# Altium PCB quark_dog_driver.PcbDoc (part 1 of 3)
Units mil, origin at the board's own origin, x right, y up, seen from the top; angles counter-clockwise.
Board outline 3937.01 x 2362.2 mil, 4 copper layers (Top Layer 1, signal1, signal2, Bottom Layer 1), stack 23.756 mil thick; 353 components, 275 nets, 1099 pads, 468 vias.
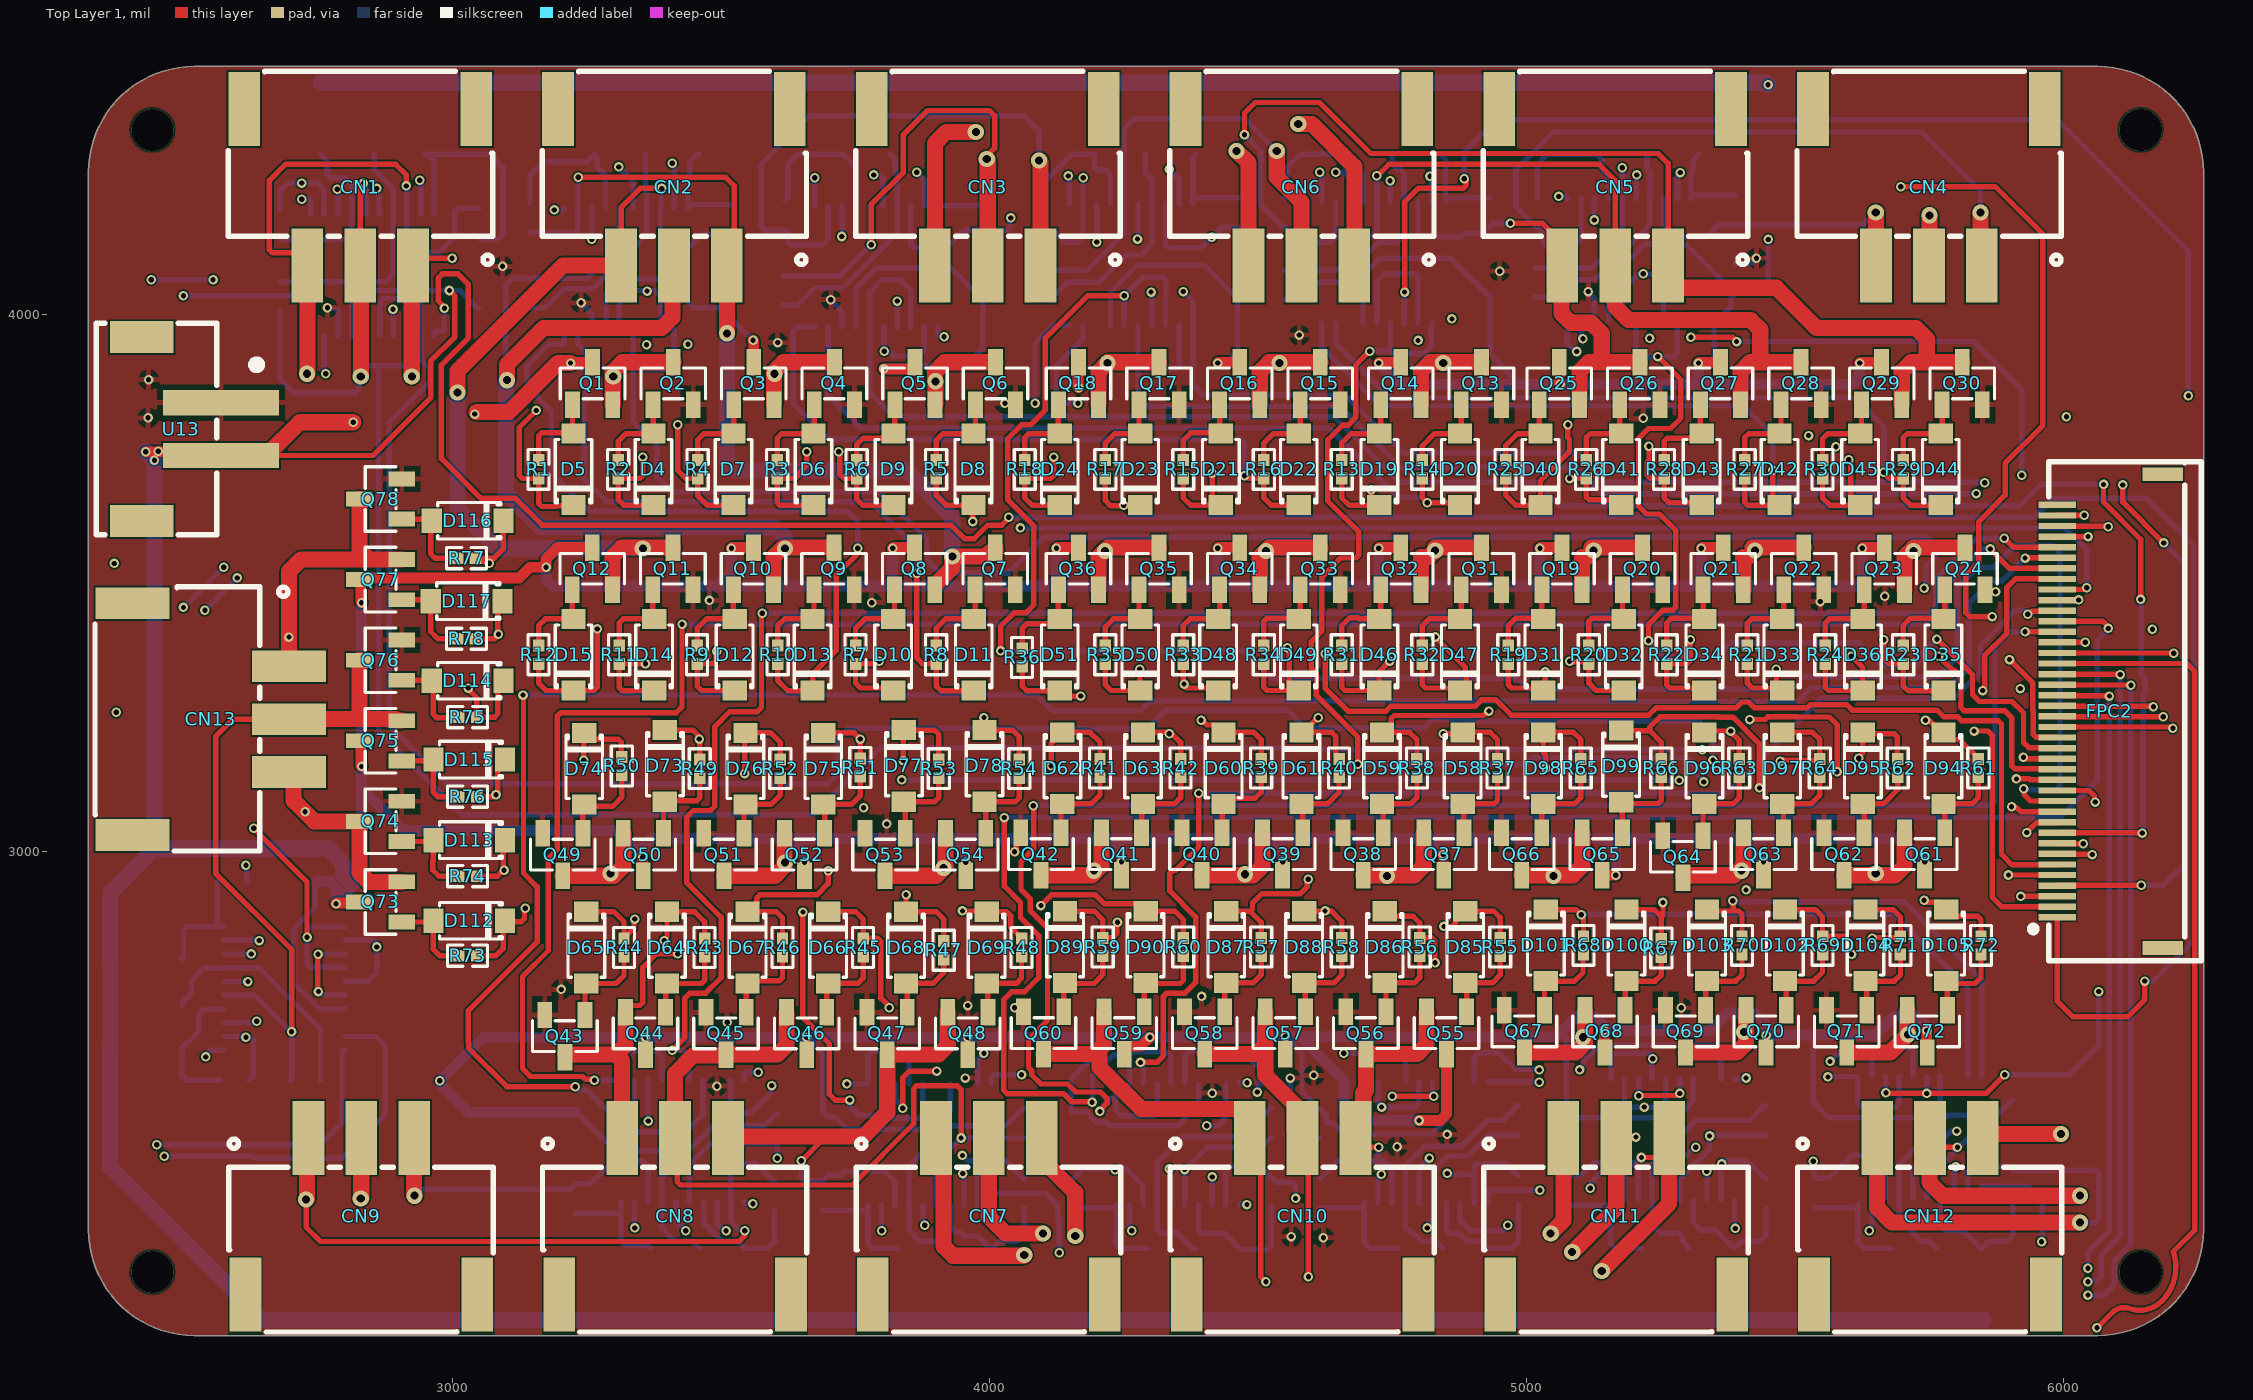
[diagram p0: Top Layer 1 view]
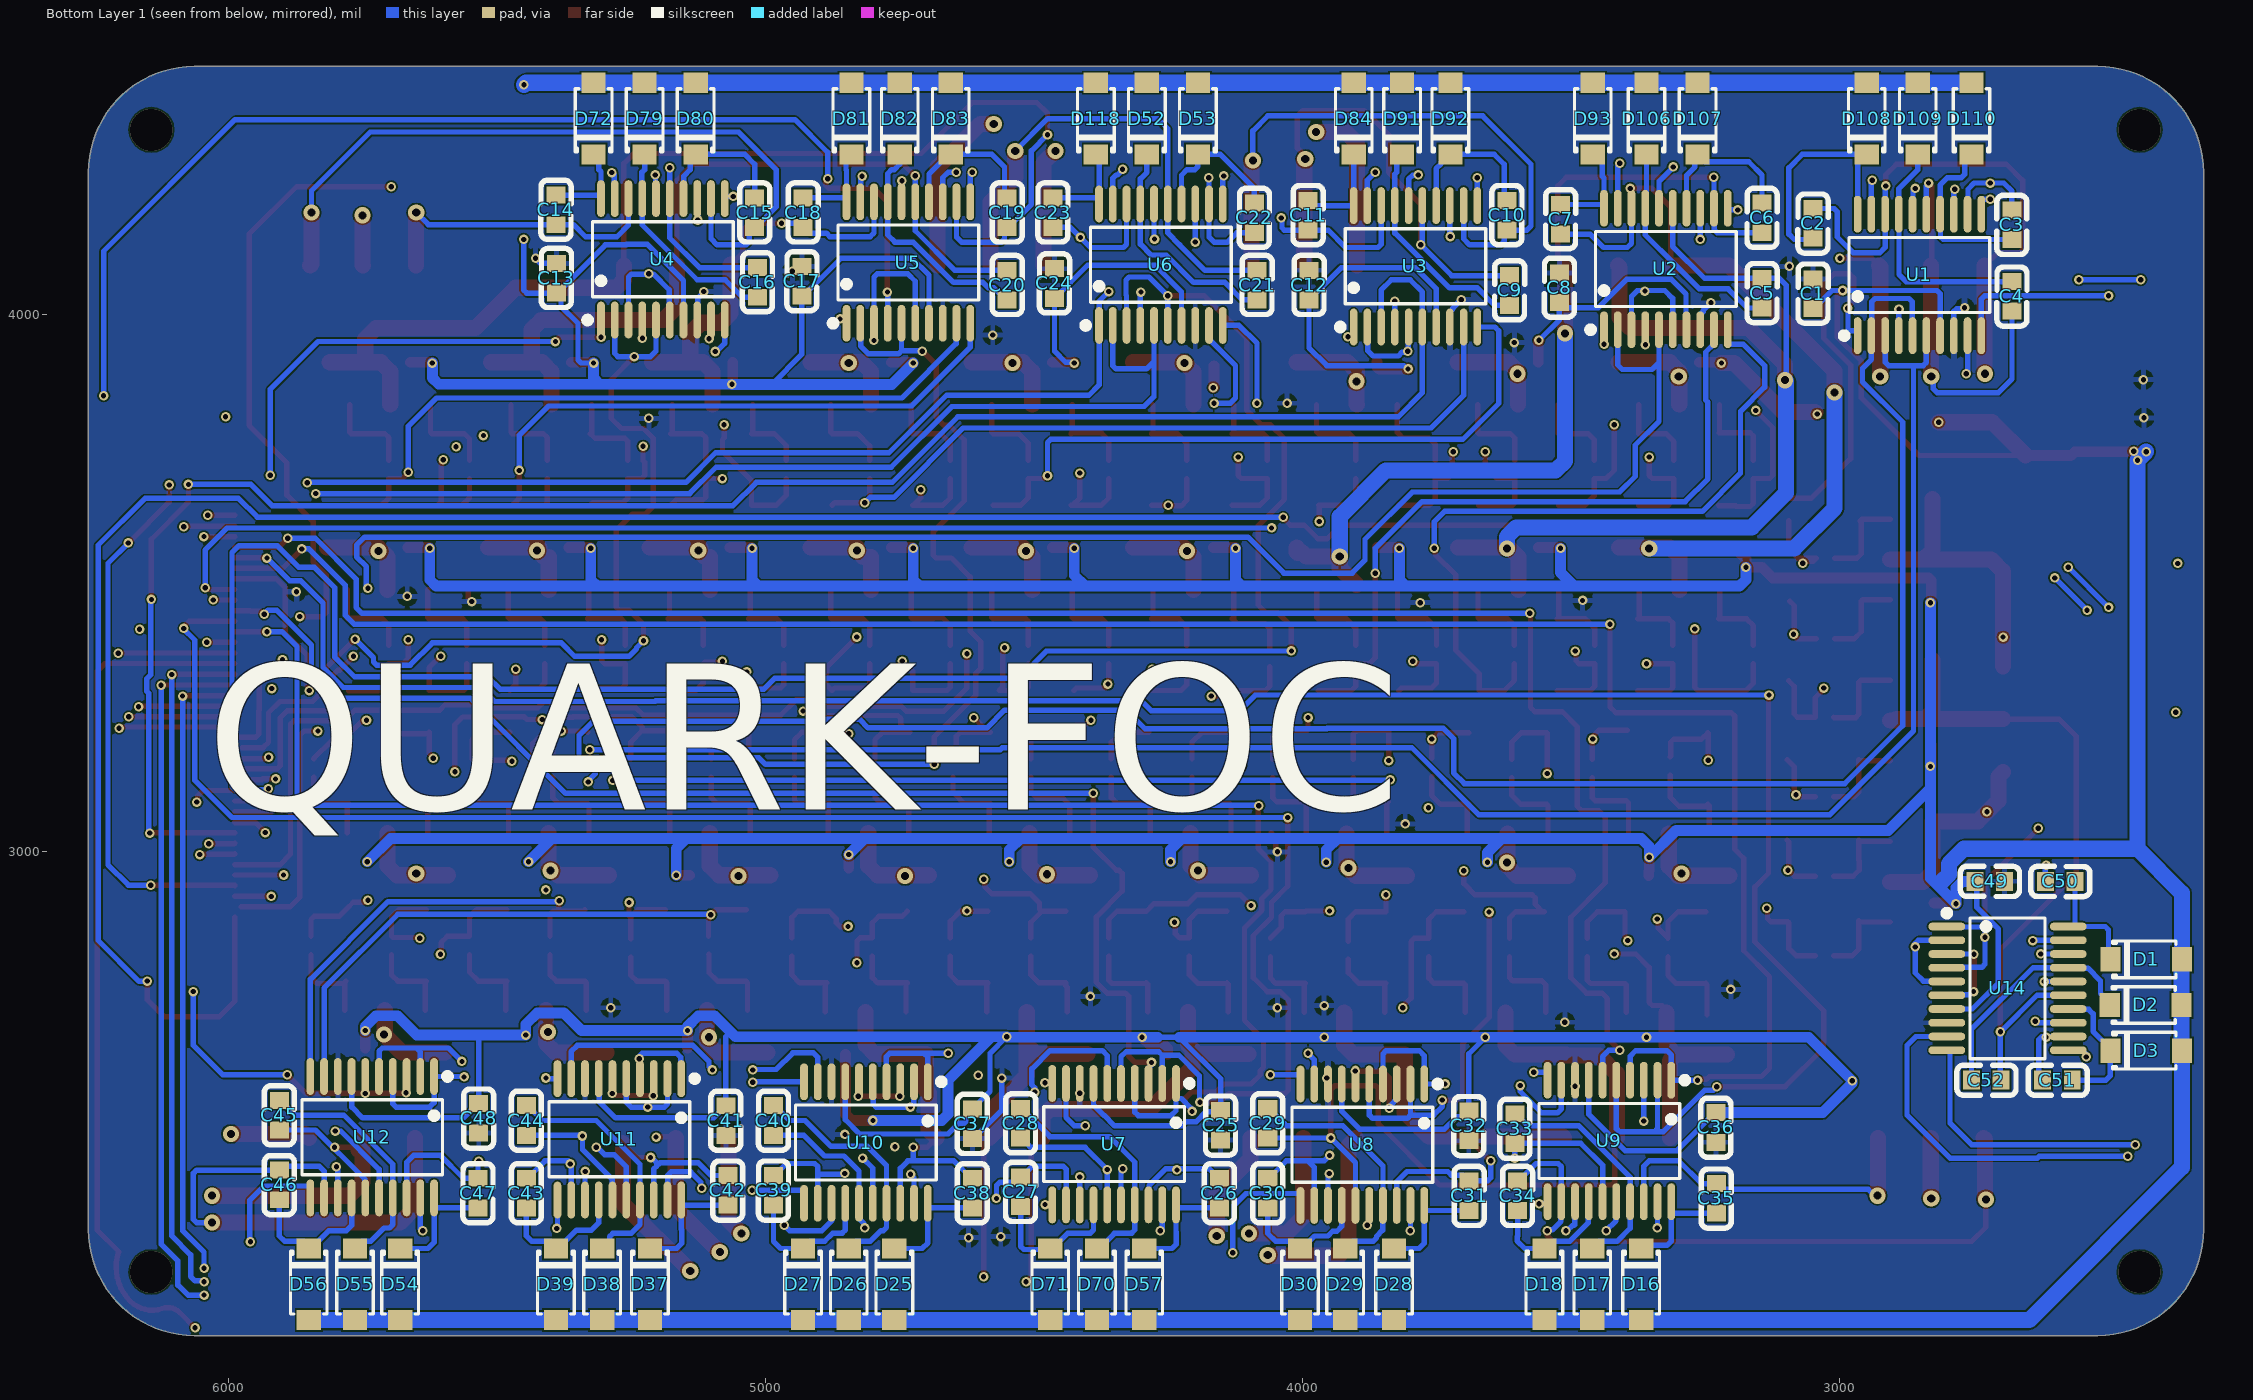
[diagram p1: Bottom Layer 1 view, seen from below]
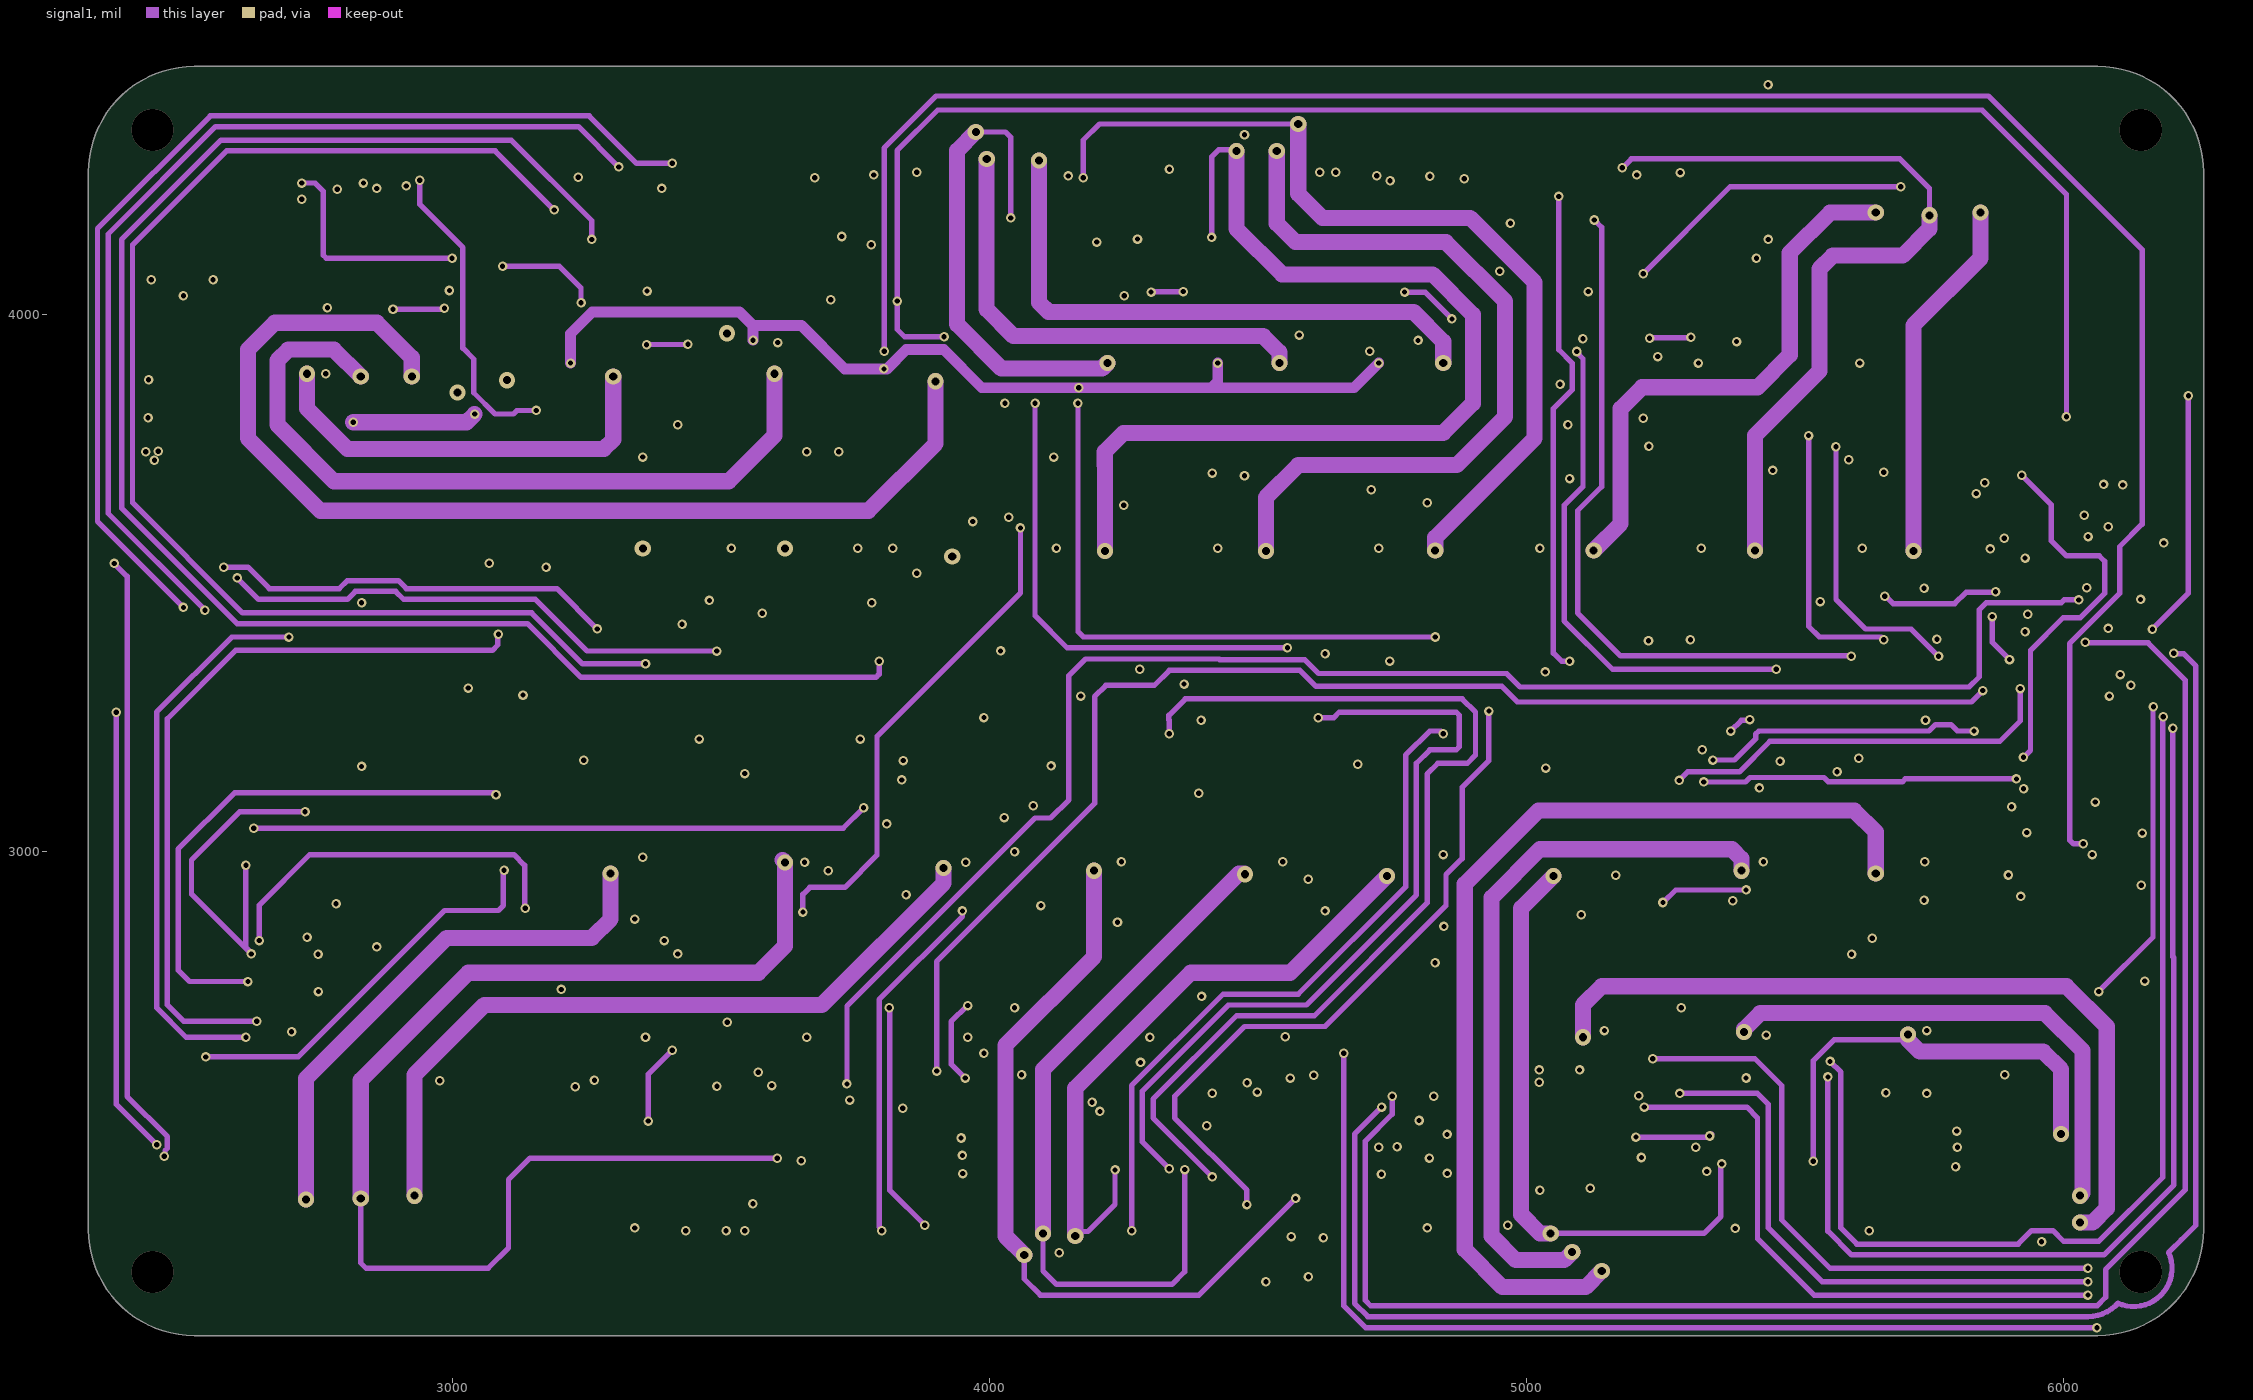
[diagram p2: signal1]
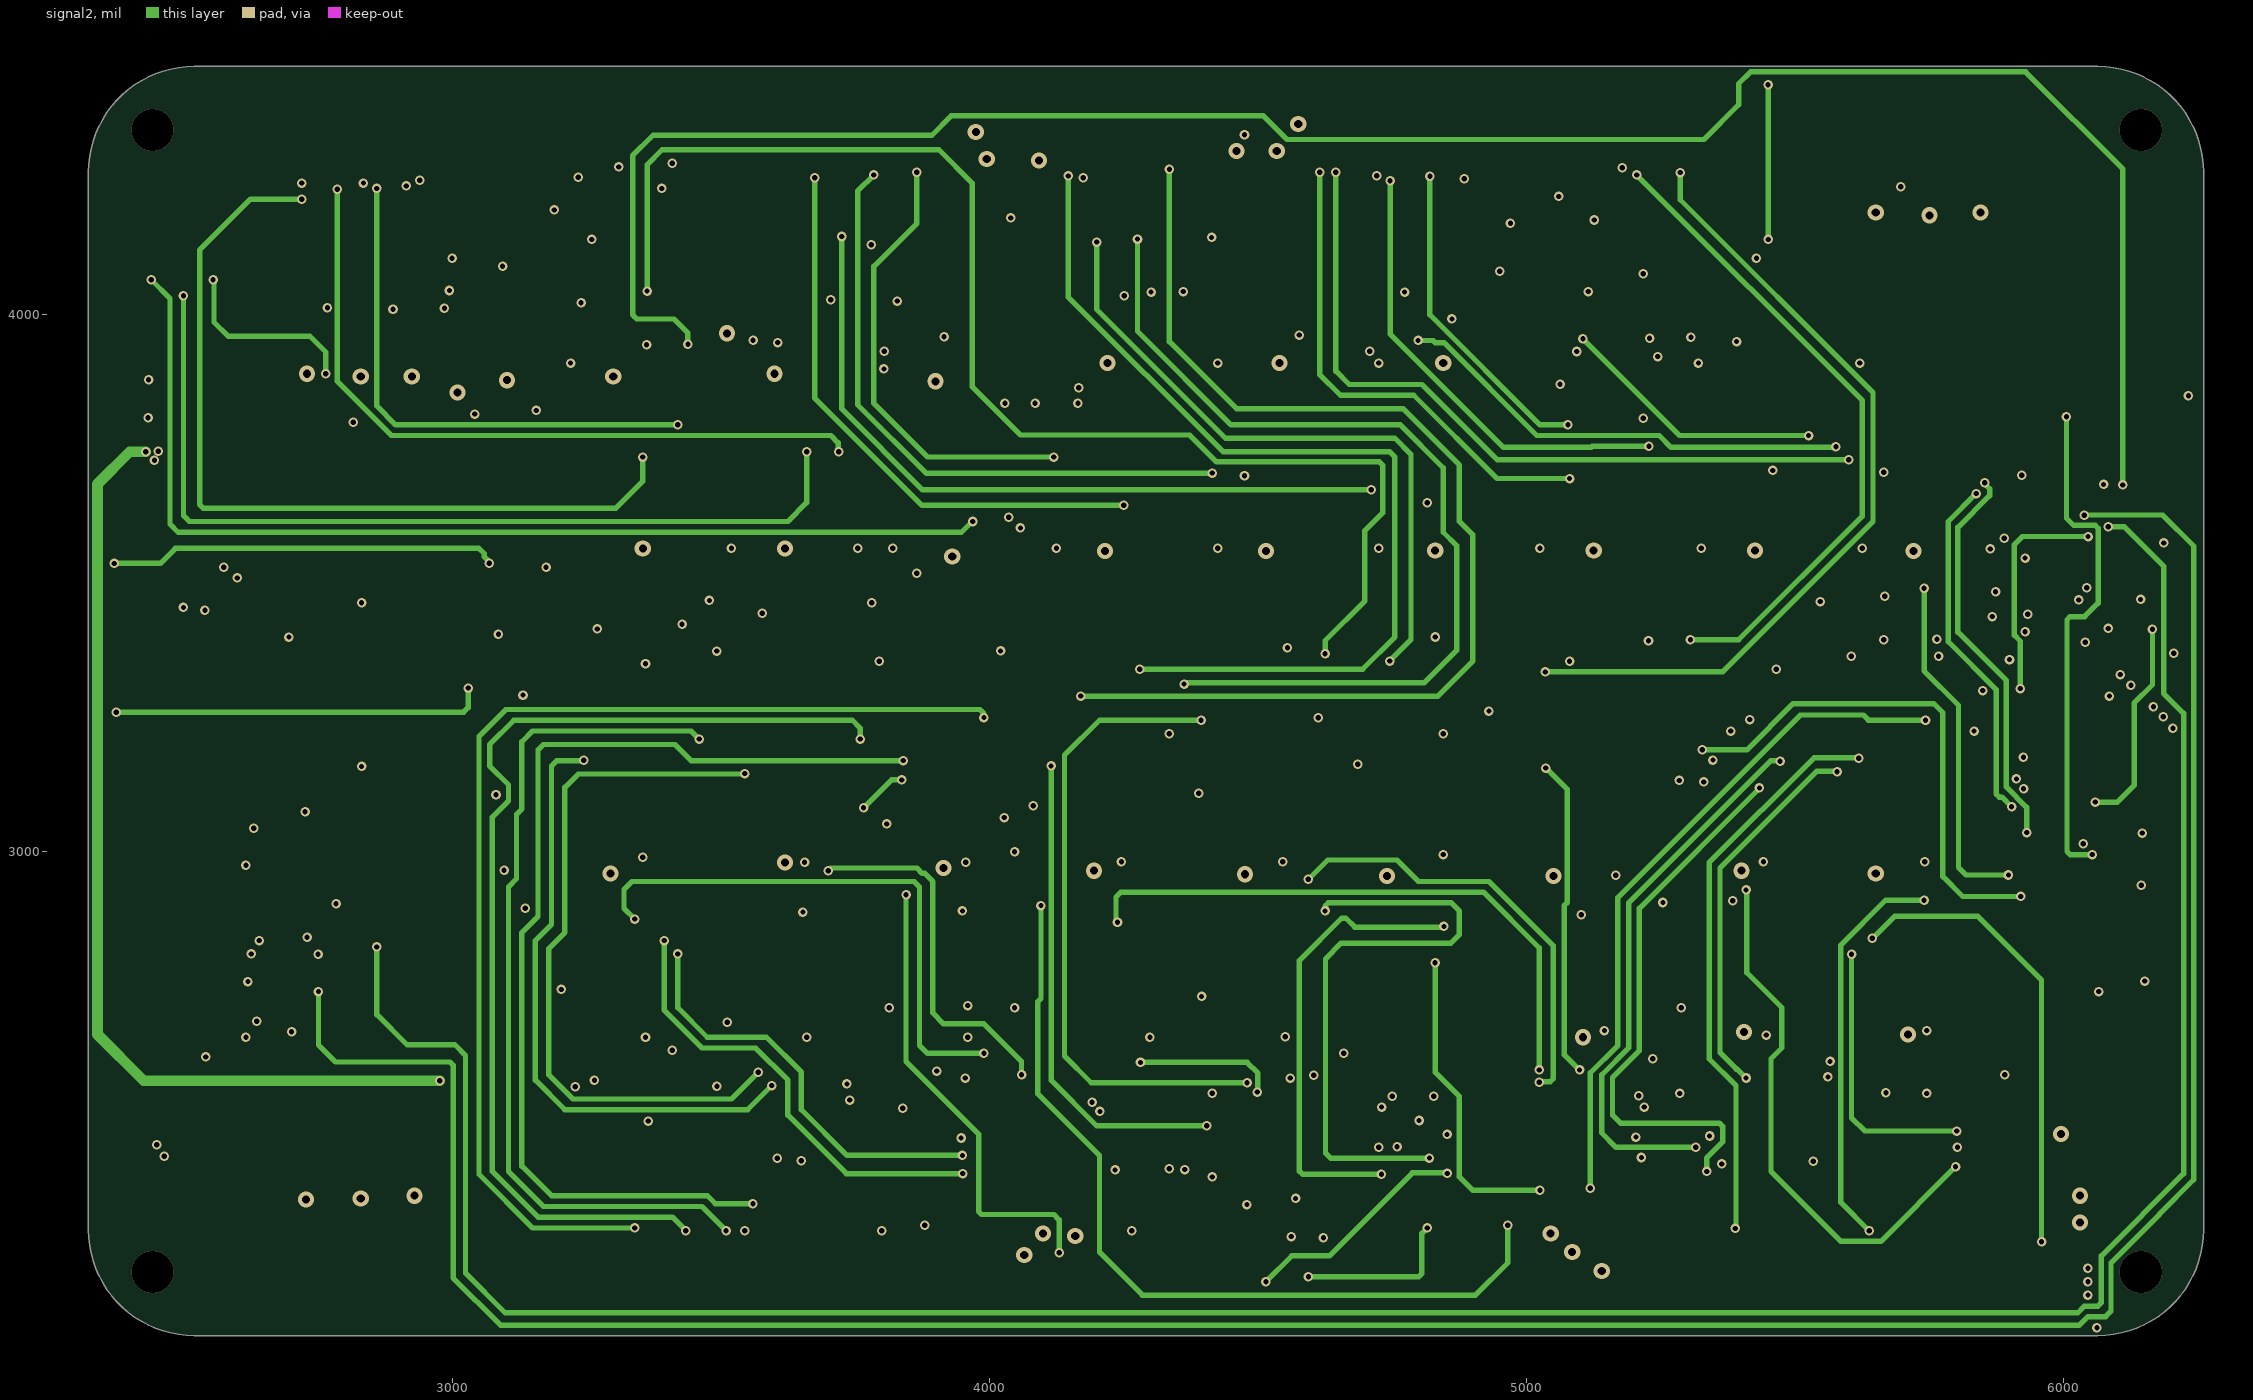
[diagram p3: signal2]

## Layer stack, top to bottom
Top Solder: solder mask 0.4, Solder Resist, Dk 3.5
Top Layer 1: signal copper 1.378
Dielectric 2: prepreg 2.8, PP-006, Dk 4.1
signal1: signal copper 1.4
Dielectric 1: dielectric 12.6, FR-4, Dk 4.8
signal2: signal copper 1.4
Dielectric 3: prepreg 2.8, PP-006, Dk 4.1
Bottom Layer 1: signal copper 1.378
Bottom Solder: solder mask 0.4, Solder Resist, Dk 3.5

## Board outline
2323.15,2296.65 ccw(c2520,2296.65) 2520,2099.8 6063.31,2099.8 ccw(c6063.31,2296.65) 6260.16,2296.65 6260.16,4265.15 ccw(c6063.31,4265.15) 6063.31,4462 2520,4462 ccw(c2520,4265.15) 2323.15,4265.15

## Design rules (kind name [scope] priority, off if disabled: settings)
Clearance [All] p1: gap=3 ignorepadtopadclearanceinfootprint=FALSE
ComponentClearance [All] p1: gap=0 collisioncheckmode=3 verticalgap=10 showdistances=FALSE
PolygonConnect [All] p1: connectstyle=Relief reliefconductorwidth=10 reliefentries=4 polygonreliefangle="90 Angle" airgapwidth=10
RoutingVias [All] p1: holewidth=28 width=50 viastyle="Through Hole" minholewidth=28 minwidth=50 maxholewidth=28 maxwidth=50
SolderMaskExpansion [All] p1: expansion=4 istentingtop=FALSE
Width [All] p1: maxlimit=50 minlimit=10 preferedwidth=10 minimp=50.000000 maximp=50.000000 favimp=50.000000
29 further rules are at their usual default settings.

## Components (designator, comment, footprint, x,y, rotation, side; value= is the part's Value field where it differs from the comment)
C1 "0.1u" C0603 3050.11,4039.03 r270 bottom
C2 "0.1u" C0603 3050,4170 r90 bottom
C3 "0.1u" C0603 2680,4167.44 r90 bottom
C4 "0.1u" C0603 2679.68,4034.03 r90 bottom
C5 "0.1u" C0603 3145,4040 r270 bottom
C6 "0.1u" C0603 3145,4180 r270 bottom
C7 "0.1u" C0603 3520,4177.44 r270 bottom
C8 "0.1u" C0603 3522.22,4050.03 r270 bottom
C9 "0.1u" C0603 3615,4045 r270 bottom
C10 "0.1u" C0603 3620,4185 r270 bottom
C11 "0.1u" C0603 3990,4185 r270 bottom
C12 "0.1u" C0603 3988.22,4055.03 r270 bottom
C13 "0.1u" C0603 5389.22,4068.03 r270 bottom
C14 "0.1u" C0603 5390,4195 r270 bottom
C15 "0.1u" C0603 5020,4190 r270 bottom
C16 "0.1u" C0603 5015,4060 r270 bottom
C17 "0.1u" C0603 4932.22,4062.03 r270 bottom
C18 "0.1u" C0603 4930,4190 r270 bottom
C19 "0.1u" C0603 4550,4190 r270 bottom
C20 "0.1u" C0603 4550,4055 r270 bottom
C21 "0.1u" C0603 4085,4055 r270 bottom
C22 "0.1u" C0603 4090,4180 r270 bottom
C23 "0.1u" C0603 4465,4190 r270 bottom
C24 "0.1u" C0603 4462.07,4058.03 r270 bottom
C25 "0.1u" C0603 4152.78,2490.97 r90 bottom
C26 "0.1u" C0603 4155,2365 r90 bottom
C27 "0.1u" C0603 4525,2367.45 r90 bottom
C28 "0.1u" C0603 4525,2495 r90 bottom
C29 "0.1u" C0603 4065,2495 r90 bottom
C30 "0.1u" C0603 4065,2365 r90 bottom
C31 "0.1u" C0603 3690,2360 r90 bottom
C32 "0.1u" C0603 3690.78,2489.97 r90 bottom
C33 "0.1u" C0603 3605,2485 r90 bottom
C34 "0.1u" C0603 3600,2360 r90 bottom
C35 "0.1u" C0603 3230,2355 r90 bottom
C36 "0.1u" C0603 3230.79,2487 r90 bottom
C37 "0.1u" C0603 4614.78,2493.97 r90 bottom
C38 "0.1u" C0603 4615,2365 r90 bottom
C39 "0.1u" C0603 4985,2370 r90 bottom
C40 "0.1u" C0603 4985,2500 r90 bottom
C41 "0.1u" C0603 5073.78,2499.97 r90 bottom
C42 "0.1u" C0603 5070,2370 r90 bottom
C43 "0.1u" C0603 5445,2365 r90 bottom
C44 "0.1u" C0603 5445,2500 r90 bottom
C45 "0.1u" C0603 5905,2510 r90 bottom
C46 "0.1u" C0603 5905,2380 r90 bottom
C47 "0.1u" C0603 5535,2365 r90 bottom
C48 "0.1u" C0603 5533.78,2503.97 r90 bottom
C49 "0.1u" C0603 2721,2945.24 r0 bottom
C50 "0.1u" C0603 2590,2945 r0 bottom
C51 "0.1u" C0603 2595,2575 r0 bottom
C52 "0.1u" C0603 2727.45,2575 r0 bottom
CN1 "WAFER-XH2.54-3PWB" CONN-SMD_3P-P2.50_XUNPU_WAFER-XH2.54-3PWB 2829,4237.03 r180 top locked
CN2 "WAFER-XH2.54-3PWB" CONN-SMD_3P-P2.50_XUNPU_WAFER-XH2.54-3PWB 3413,4237.03 r180 top locked
CN3 "WAFER-XH2.54-3PWB" CONN-SMD_3P-P2.50_XUNPU_WAFER-XH2.54-3PWB 3997,4237.03 r180 top locked
CN4 "WAFER-XH2.54-3PWB" CONN-SMD_3P-P2.50_XUNPU_WAFER-XH2.54-3PWB 5749,4237.03 r180 top locked
CN5 "WAFER-XH2.54-3PWB" CONN-SMD_3P-P2.50_XUNPU_WAFER-XH2.54-3PWB 5165,4237.03 r180 top locked
CN6 "WAFER-XH2.54-3PWB" CONN-SMD_3P-P2.50_XUNPU_WAFER-XH2.54-3PWB 4581,4237.03 r180 top locked
CN7 "WAFER-XH2.54-3PWB" CONN-SMD_3P-P2.50_XUNPU_WAFER-XH2.54-3PWB 3999,2322.03 r0 top locked
CN8 "WAFER-XH2.54-3PWB" CONN-SMD_3P-P2.50_XUNPU_WAFER-XH2.54-3PWB 3415,2322.03 r0 top locked
CN9 "WAFER-XH2.54-3PWB" CONN-SMD_3P-P2.50_XUNPU_WAFER-XH2.54-3PWB 2831,2322.03 r0 top locked
CN10 "WAFER-XH2.54-3PWB" CONN-SMD_3P-P2.50_XUNPU_WAFER-XH2.54-3PWB 4583.01,2322.03 r0 top locked
CN11 "WAFER-XH2.54-3PWB" CONN-SMD_3P-P2.50_XUNPU_WAFER-XH2.54-3PWB 5167.01,2322.03 r0 top locked
CN12 "WAFER-XH2.54-3PWB" CONN-SMD_3P-P2.50_XUNPU_WAFER-XH2.54-3PWB 5751,2322.03 r0 top locked
CN13 "WAFER-XH2.54-3PWB" CONN-SMD_3P-P2.50_XUNPU_WAFER-XH2.54-3PWB 2551,3247.03 r270 top locked
D1 "FR107_C511885" SOD-123_L2.8-W1.8-LS3.7-RD 2430,2800 r180 bottom
D2 "FR107_C511885" SOD-123_L2.8-W1.8-LS3.7-RD 2431,2715.03 r180 bottom
D3 "FR107_C511885" SOD-123_L2.8-W1.8-LS3.7-RD 2430,2630 r180 bottom
D4 "1N4148W_C176288" SOD-123_L2.8-W1.8-LS3.7-RD 3374.9,3712.03 r90 top
D5 "1N4148W_C176288" SOD-123_L2.8-W1.8-LS3.7-RD 3226,3712.03 r90 top
D6 "1N4148W_C176288" SOD-123_L2.8-W1.8-LS3.7-RD 3672.68,3712.03 r90 top
D7 "1N4148W_C176288" SOD-123_L2.8-W1.8-LS3.7-RD 3523.79,3712.03 r90 top
D8 "1N4148W_C176288" SOD-123_L2.8-W1.8-LS3.7-RD 3970.47,3712.03 r90 top
D9 "1N4148W_C176288" SOD-123_L2.8-W1.8-LS3.7-RD 3821.58,3712.03 r90 top
D10 "1N4148W_C176288" SOD-123_L2.8-W1.8-LS3.7-RD 3821,3367.03 r90 top
D11 "1N4148W_C176288" SOD-123_L2.8-W1.8-LS3.7-RD 3971,3367.03 r90 top
D12 "1N4148W_C176288" SOD-123_L2.8-W1.8-LS3.7-RD 3526,3367.03 r90 top
D13 "1N4148W_C176288" SOD-123_L2.8-W1.8-LS3.7-RD 3671,3367.03 r90 top
D14 "1N4148W_C176288" SOD-123_L2.8-W1.8-LS3.7-RD 3376,3367.03 r90 top
D15 "1N4148W_C176288" SOD-123_L2.8-W1.8-LS3.7-RD 3226,3367.03 r90 top
D16 "FR107_C511885" SOD-123_L2.8-W1.8-LS3.7-RD 3370,2195 r270 bottom
D17 "FR107_C511885" SOD-123_L2.8-W1.8-LS3.7-RD 3461,2195 r270 bottom
D18 "FR107_C511885" SOD-123_L2.8-W1.8-LS3.7-RD 3550,2195 r270 bottom
D19 "1N4148W_C176288" SOD-123_L2.8-W1.8-LS3.7-RD 4726,3712.03 r90 top
D20 "1N4148W_C176288" SOD-123_L2.8-W1.8-LS3.7-RD 4876,3712.03 r90 top
D21 "1N4148W_C176288" SOD-123_L2.8-W1.8-LS3.7-RD 4431,3712.03 r90 top
D22 "1N4148W_C176288" SOD-123_L2.8-W1.8-LS3.7-RD 4576,3712.03 r90 top
D23 "1N4148W_C176288" SOD-123_L2.8-W1.8-LS3.7-RD 4281,3712.03 r90 top
D24 "1N4148W_C176288" SOD-123_L2.8-W1.8-LS3.7-RD 4131,3712.03 r90 top
D25 "FR107_C511885" SOD-123_L2.8-W1.8-LS3.7-RD 4760,2195 r270 bottom
D26 "FR107_C511885" SOD-123_L2.8-W1.8-LS3.7-RD 4845,2195 r270 bottom
D27 "FR107_C511885" SOD-123_L2.8-W1.8-LS3.7-RD 4930,2195 r270 bottom
D28 "FR107_C511885" SOD-123_L2.8-W1.8-LS3.7-RD 3830,2195 r270 bottom
D29 "FR107_C511885" SOD-123_L2.8-W1.8-LS3.7-RD 3921,2195 r270 bottom
D30 "FR107_C511885" SOD-123_L2.8-W1.8-LS3.7-RD 4005,2195 r270 bottom
D31 "1N4148W_C176288" SOD-123_L2.8-W1.8-LS3.7-RD 5031,3367.03 r90 top
D32 "1N4148W_C176288" SOD-123_L2.8-W1.8-LS3.7-RD 5181,3367.03 r90 top
D33 "1N4148W_C176288" SOD-123_L2.8-W1.8-LS3.7-RD 5476,3367.03 r90 top
D34 "1N4148W_C176288" SOD-123_L2.8-W1.8-LS3.7-RD 5331,3367.03 r90 top
D35 "1N4148W_C176288" SOD-123_L2.8-W1.8-LS3.7-RD 5776,3367.03 r90 top
D36 "1N4148W_C176288" SOD-123_L2.8-W1.8-LS3.7-RD 5626,3367.03 r90 top
D37 "FR107_C511885" SOD-123_L2.8-W1.8-LS3.7-RD 5215,2195 r270 bottom
D38 "FR107_C511885" SOD-123_L2.8-W1.8-LS3.7-RD 5304,2195 r270 bottom
D39 "FR107_C511885" SOD-123_L2.8-W1.8-LS3.7-RD 5390,2195 r270 bottom
D40 "1N4148W_C176288" SOD-123_L2.8-W1.8-LS3.7-RD 5026,3712.03 r90 top
D41 "1N4148W_C176288" SOD-123_L2.8-W1.8-LS3.7-RD 5176,3712.03 r90 top
D42 "1N4148W_C176288" SOD-123_L2.8-W1.8-LS3.7-RD 5471,3712.03 r90 top
D43 "1N4148W_C176288" SOD-123_L2.8-W1.8-LS3.7-RD 5326,3712.03 r90 top
D44 "1N4148W_C176288" SOD-123_L2.8-W1.8-LS3.7-RD 5771,3712.03 r90 top
D45 "1N4148W_C176288" SOD-123_L2.8-W1.8-LS3.7-RD 5621,3712.03 r90 top
D46 "1N4148W_C176288" SOD-123_L2.8-W1.8-LS3.7-RD 4726,3367.03 r90 top
D47 "1N4148W_C176288" SOD-123_L2.8-W1.8-LS3.7-RD 4876,3367.03 r90 top
D48 "1N4148W_C176288" SOD-123_L2.8-W1.8-LS3.7-RD 4426,3367.03 r90 top
D49 "1N4148W_C176288" SOD-123_L2.8-W1.8-LS3.7-RD 4576,3367.03 r90 top
D50 "1N4148W_C176288" SOD-123_L2.8-W1.8-LS3.7-RD 4281,3367.03 r90 top
D51 "1N4148W_C176288" SOD-123_L2.8-W1.8-LS3.7-RD 4131,3367.03 r90 top
D52 "FR107_C511885" SOD-123_L2.8-W1.8-LS3.7-RD 4290,4365 r90 bottom
D53 "FR107_C511885" SOD-123_L2.8-W1.8-LS3.7-RD 4195,4365 r90 bottom
D54 "FR107_C511885" SOD-123_L2.8-W1.8-LS3.7-RD 5680,2195 r270 bottom
D55 "FR107_C511885" SOD-123_L2.8-W1.8-LS3.7-RD 5764,2195 r270 bottom
D56 "FR107_C511885" SOD-123_L2.8-W1.8-LS3.7-RD 5850,2195 r270 bottom
D57 "FR107_C511885" SOD-123_L2.8-W1.8-LS3.7-RD 4295,2195 r270 bottom
D58 "1N4148W_C176288" SOD-123_L2.8-W1.8-LS3.7-RD 4881,3155.97 r270 top
D59 "1N4148W_C176288" SOD-123_L2.8-W1.8-LS3.7-RD 4731,3155.97 r270 top
D60 "1N4148W_C176288" SOD-123_L2.8-W1.8-LS3.7-RD 4436,3155.97 r270 top
D61 "1N4148W_C176288" SOD-123_L2.8-W1.8-LS3.7-RD 4581,3155.97 r270 top
D62 "1N4148W_C176288" SOD-123_L2.8-W1.8-LS3.7-RD 4136,3155.97 r270 top
D63 "1N4148W_C176288" SOD-123_L2.8-W1.8-LS3.7-RD 4286,3155.97 r270 top
D64 "1N4148W_C176288" SOD-123_L2.8-W1.8-LS3.7-RD 3400,2821.97 r270 top
D65 "1N4148W_C176288" SOD-123_L2.8-W1.8-LS3.7-RD 3250,2821.97 r270 top
D66 "1N4148W_C176288" SOD-123_L2.8-W1.8-LS3.7-RD 3700,2821.97 r270 top
D67 "1N4148W_C176288" SOD-123_L2.8-W1.8-LS3.7-RD 3550,2821.97 r270 top
D68 "1N4148W_C176288" SOD-123_L2.8-W1.8-LS3.7-RD 3845,2821.97 r270 top
D69 "1N4148W_C176288" SOD-123_L2.8-W1.8-LS3.7-RD 3995,2821.97 r270 top
D70 "FR107_C511885" SOD-123_L2.8-W1.8-LS3.7-RD 4383,2195 r270 bottom
D71 "FR107_C511885" SOD-123_L2.8-W1.8-LS3.7-RD 4470,2195 r270 bottom
D72 "FR107_C511885" SOD-123_L2.8-W1.8-LS3.7-RD 5320,4365 r90 bottom
D73 "1N4148W_C176288" SOD-123_L2.8-W1.8-LS3.7-RD 3396,3160 r270 top
D74 "1N4148W_C176288" SOD-123_L2.8-W1.8-LS3.7-RD 3246,3155 r270 top
D75 "1N4148W_C176288" SOD-123_L2.8-W1.8-LS3.7-RD 3691,3155 r270 top
D76 "1N4148W_C176288" SOD-123_L2.8-W1.8-LS3.7-RD 3546,3155 r270 top
D77 "1N4148W_C176288" SOD-123_L2.8-W1.8-LS3.7-RD 3841,3160 r270 top
D78 "1N4148W_C176288" SOD-123_L2.8-W1.8-LS3.7-RD 3991,3160 r270 top
D79 "FR107_C511885" SOD-123_L2.8-W1.8-LS3.7-RD 5225,4365 r90 bottom
D80 "FR107_C511885" SOD-123_L2.8-W1.8-LS3.7-RD 5130,4365 r90 bottom
D81 "FR107_C511885" SOD-123_L2.8-W1.8-LS3.7-RD 4840,4365 r90 bottom
D82 "FR107_C511885" SOD-123_L2.8-W1.8-LS3.7-RD 4750,4365 r90 bottom
D83 "FR107_C511885" SOD-123_L2.8-W1.8-LS3.7-RD 4655,4365 r90 bottom
D84 "FR107_C511885" SOD-123_L2.8-W1.8-LS3.7-RD 3905,4365 r90 bottom
D85 "1N4148W_C176288" SOD-123_L2.8-W1.8-LS3.7-RD 4886,2822.87 r270 top
D86 "1N4148W_C176288" SOD-123_L2.8-W1.8-LS3.7-RD 4736,2822.87 r270 top
D87 "1N4148W_C176288" SOD-123_L2.8-W1.8-LS3.7-RD 4441,2822.87 r270 top
D88 "1N4148W_C176288" SOD-123_L2.8-W1.8-LS3.7-RD 4586,2822.87 r270 top
D89 "1N4148W_C176288" SOD-123_L2.8-W1.8-LS3.7-RD 4141,2822.87 r270 top
D90 "1N4148W_C176288" SOD-123_L2.8-W1.8-LS3.7-RD 4291,2822.87 r270 top
D91 "FR107_C511885" SOD-123_L2.8-W1.8-LS3.7-RD 3815,4365 r90 bottom
D92 "FR107_C511885" SOD-123_L2.8-W1.8-LS3.7-RD 3725,4365 r90 bottom
D93 "FR107_C511885" SOD-123_L2.8-W1.8-LS3.7-RD 3460,4365 r90 bottom
D94 "1N4148W_C176288" SOD-123_L2.8-W1.8-LS3.7-RD 5776,3155.97 r270 top
D95 "1N4148W_C176288" SOD-123_L2.8-W1.8-LS3.7-RD 5626,3155.97 r270 top
D96 "1N4148W_C176288" SOD-123_L2.8-W1.8-LS3.7-RD 5331,3155.97 r270 top
D97 "1N4148W_C176288" SOD-123_L2.8-W1.8-LS3.7-RD 5476,3155.97 r270 top
D98 "1N4148W_C176288" SOD-123_L2.8-W1.8-LS3.7-RD 5031,3155.97 r270 top
D99 "1N4148W_C176288" SOD-123_L2.8-W1.8-LS3.7-RD 5176,3159 r270 top
D100 "1N4148W_C176288" SOD-123_L2.8-W1.8-LS3.7-RD 5186,2825.97 r270 top
D101 "1N4148W_C176288" SOD-123_L2.8-W1.8-LS3.7-RD 5036,2825.97 r270 top
D102 "1N4148W_C176288" SOD-123_L2.8-W1.8-LS3.7-RD 5481,2825.97 r270 top
D103 "1N4148W_C176288" SOD-123_L2.8-W1.8-LS3.7-RD 5336,2825.97 r270 top
D104 "1N4148W_C176288" SOD-123_L2.8-W1.8-LS3.7-RD 5631,2825.97 r270 top
D105 "1N4148W_C176288" SOD-123_L2.8-W1.8-LS3.7-RD 5781,2825.97 r270 top
D106 "FR107_C511885" SOD-123_L2.8-W1.8-LS3.7-RD 3360,4365 r90 bottom
D107 "FR107_C511885" SOD-123_L2.8-W1.8-LS3.7-RD 3265,4365 r90 bottom
D108 "FR107_C511885" SOD-123_L2.8-W1.8-LS3.7-RD 2950,4365 r90 bottom
D109 "FR107_C511885" SOD-123_L2.8-W1.8-LS3.7-RD 2855,4365 r90 bottom
D110 "FR107_C511885" SOD-123_L2.8-W1.8-LS3.7-RD 2755,4365 r90 bottom
D112 "1N4148W_C176288" SOD-123_L2.8-W1.8-LS3.7-RD 3031.89,2871.84 r180 top
D113 "1N4148W_C176288" SOD-123_L2.8-W1.8-LS3.7-RD 3031.89,3021.84 r180 top
D114 "1N4148W_C176288" SOD-123_L2.8-W1.8-LS3.7-RD 3028.86,3318.53 r180 top
D115 "1N4148W_C176288" SOD-123_L2.8-W1.8-LS3.7-RD 3031.89,3171.84 r180 top
D116 "1N4148W_C176288" SOD-123_L2.8-W1.8-LS3.7-RD 3028.85,3616.32 r180 top
D117 "1N4148W_C176288" SOD-123_L2.8-W1.8-LS3.7-RD 3026.89,3466.84 r180 top
D118 "FR107_C511885" SOD-123_L2.8-W1.8-LS3.7-RD 4385,4365 r90 bottom
FPC2 "40FHH-SM1-GAN-TF(LF)(SN)" FPC-SMD_JST_40FHH-SM1-GAN-TF 6086,3262.03 r90 top locked
Q1 "AP2300" SOT-23-3_L2.9-W1.3-P0.95-LS2.4-BR 3261.58,3872.03 r270 top
Q2 "AP2300" SOT-23-3_L2.9-W1.3-P0.95-LS2.4-BR 3411.58,3872.03 r270 top
Q3 "AP2300" SOT-23-3_L2.9-W1.3-P0.95-LS2.4-BR 3561.58,3872.03 r270 top
Q4 "AP2300" SOT-23-3_L2.9-W1.3-P0.95-LS2.4-BR 3711.58,3872.03 r270 top
Q5 "AP2300" SOT-23-3_L2.9-W1.3-P0.95-LS2.4-BR 3861.58,3872.03 r270 top
Q6 "AP2300" SOT-23-3_L2.9-W1.3-P0.95-LS2.4-BR 4011.58,3872.03 r270 top
Q7 "AP2300" SOT-23-3_L2.9-W1.3-P0.95-LS2.4-BR 4011,3527.03 r270 top
Q8 "AP2300" SOT-23-3_L2.9-W1.3-P0.95-LS2.4-BR 3861,3527.03 r270 top
Q9 "AP2300" SOT-23-3_L2.9-W1.3-P0.95-LS2.4-BR 3711,3527.03 r270 top
Q10 "AP2300" SOT-23-3_L2.9-W1.3-P0.95-LS2.4-BR 3561,3527.03 r270 top
Q11 "AP2300" SOT-23-3_L2.9-W1.3-P0.95-LS2.4-BR 3411,3527.03 r270 top
Q12 "AP2300" SOT-23-3_L2.9-W1.3-P0.95-LS2.4-BR 3261,3527.03 r270 top
Q13 "AP2300" SOT-23-3_L2.9-W1.3-P0.95-LS2.4-BR 4916,3872.03 r270 top
Q14 "AP2300" SOT-23-3_L2.9-W1.3-P0.95-LS2.4-BR 4766,3872.03 r270 top
Q15 "AP2300" SOT-23-3_L2.9-W1.3-P0.95-LS2.4-BR 4616,3872.03 r270 top
Q16 "AP2300" SOT-23-3_L2.9-W1.3-P0.95-LS2.4-BR 4466,3872.03 r270 top
Q17 "AP2300" SOT-23-3_L2.9-W1.3-P0.95-LS2.4-BR 4316,3872.03 r270 top
Q18 "AP2300" SOT-23-3_L2.9-W1.3-P0.95-LS2.4-BR 4166,3872.03 r270 top
Q19 "AP2300" SOT-23-3_L2.9-W1.3-P0.95-LS2.4-BR 5066,3527.03 r270 top
Q20 "AP2300" SOT-23-3_L2.9-W1.3-P0.95-LS2.4-BR 5216,3527.03 r270 top
Q21 "AP2300" SOT-23-3_L2.9-W1.3-P0.95-LS2.4-BR 5366,3527.03 r270 top
Q22 "AP2300" SOT-23-3_L2.9-W1.3-P0.95-LS2.4-BR 5516,3527.03 r270 top
Q23 "AP2300" SOT-23-3_L2.9-W1.3-P0.95-LS2.4-BR 5666,3527.03 r270 top
Q24 "AP2300" SOT-23-3_L2.9-W1.3-P0.95-LS2.4-BR 5816,3527.03 r270 top
Q25 "AP2300" SOT-23-3_L2.9-W1.3-P0.95-LS2.4-BR 5061,3872.03 r270 top
Q26 "AP2300" SOT-23-3_L2.9-W1.3-P0.95-LS2.4-BR 5211,3872.03 r270 top
Q27 "AP2300" SOT-23-3_L2.9-W1.3-P0.95-LS2.4-BR 5361,3872.03 r270 top
Q28 "AP2300" SOT-23-3_L2.9-W1.3-P0.95-LS2.4-BR 5511,3872.03 r270 top
Q29 "AP2300" SOT-23-3_L2.9-W1.3-P0.95-LS2.4-BR 5661,3872.03 r270 top
Q30 "AP2300" SOT-23-3_L2.9-W1.3-P0.95-LS2.4-BR 5811,3872.03 r270 top
Q31 "AP2300" SOT-23-3_L2.9-W1.3-P0.95-LS2.4-BR 4916,3527.03 r270 top
Q32 "AP2300" SOT-23-3_L2.9-W1.3-P0.95-LS2.4-BR 4766,3527.03 r270 top
Q33 "AP2300" SOT-23-3_L2.9-W1.3-P0.95-LS2.4-BR 4616,3527.03 r270 top
Q34 "AP2300" SOT-23-3_L2.9-W1.3-P0.95-LS2.4-BR 4466,3527.03 r270 top
Q35 "AP2300" SOT-23-3_L2.9-W1.3-P0.95-LS2.4-BR 4316,3527.03 r270 top
Q36 "AP2300" SOT-23-3_L2.9-W1.3-P0.95-LS2.4-BR 4166,3527.03 r270 top
Q37 "AP2300" SOT-23-3_L2.9-W1.3-P0.95-LS2.4-BR 4846,2995.97 r90 top
Q38 "AP2300" SOT-23-3_L2.9-W1.3-P0.95-LS2.4-BR 4696,2995.97 r90 top
Q39 "AP2300" SOT-23-3_L2.9-W1.3-P0.95-LS2.4-BR 4546,2995.97 r90 top
Q40 "AP2300" SOT-23-3_L2.9-W1.3-P0.95-LS2.4-BR 4396,2995.97 r90 top
Q41 "AP2300" SOT-23-3_L2.9-W1.3-P0.95-LS2.4-BR 4246,2995.97 r90 top
Q42 "AP2300" SOT-23-3_L2.9-W1.3-P0.95-LS2.4-BR 4096,2995.97 r90 top
Q43 "AP2300" SOT-23-3_L2.9-W1.3-P0.95-LS2.4-BR 3210,2656.97 r90 top
Q44 "AP2300" SOT-23-3_L2.9-W1.3-P0.95-LS2.4-BR 3360,2661.97 r90 top
Q45 "AP2300" SOT-23-3_L2.9-W1.3-P0.95-LS2.4-BR 3510,2661.97 r90 top
Q46 "AP2300" SOT-23-3_L2.9-W1.3-P0.95-LS2.4-BR 3660,2661.97 r90 top
Q47 "AP2300" SOT-23-3_L2.9-W1.3-P0.95-LS2.4-BR 3810,2661.97 r90 top
Q48 "AP2300" SOT-23-3_L2.9-W1.3-P0.95-LS2.4-BR 3960,2661.97 r90 top
Q49 "AP2300" SOT-23-3_L2.9-W1.3-P0.95-LS2.4-BR 3206,2995 r90 top
Q50 "AP2300" SOT-23-3_L2.9-W1.3-P0.95-LS2.4-BR 3356,2995 r90 top
Q51 "AP2300" SOT-23-3_L2.9-W1.3-P0.95-LS2.4-BR 3506,2995 r90 top
Q52 "AP2300" SOT-23-3_L2.9-W1.3-P0.95-LS2.4-BR 3656,2995 r90 top
Q53 "AP2300" SOT-23-3_L2.9-W1.3-P0.95-LS2.4-BR 3806,2995 r90 top
Q54 "AP2300" SOT-23-3_L2.9-W1.3-P0.95-LS2.4-BR 3956,2995 r90 top
Q55 "AP2300" SOT-23-3_L2.9-W1.3-P0.95-LS2.4-BR 4851,2662.87 r90 top
Q56 "AP2300" SOT-23-3_L2.9-W1.3-P0.95-LS2.4-BR 4701,2662.87 r90 top
Q57 "AP2300" SOT-23-3_L2.9-W1.3-P0.95-LS2.4-BR 4551,2662.87 r90 top
Q58 "AP2300" SOT-23-3_L2.9-W1.3-P0.95-LS2.4-BR 4401,2662.87 r90 top
Q59 "AP2300" SOT-23-3_L2.9-W1.3-P0.95-LS2.4-BR 4251,2662.87 r90 top
Q60 "AP2300" SOT-23-3_L2.9-W1.3-P0.95-LS2.4-BR 4101,2662.87 r90 top
Q61 "AP2300" SOT-23-3_L2.9-W1.3-P0.95-LS2.4-BR 5741,2995.97 r90 top
Q62 "AP2300" SOT-23-3_L2.9-W1.3-P0.95-LS2.4-BR 5591,2995.97 r90 top
Q63 "AP2300" SOT-23-3_L2.9-W1.3-P0.95-LS2.4-BR 5441,2995.97 r90 top
Q64 "AP2300" SOT-23-3_L2.9-W1.3-P0.95-LS2.4-BR 5291,2990.97 r90 top
Q65 "AP2300" SOT-23-3_L2.9-W1.3-P0.95-LS2.4-BR 5141,2995.97 r90 top
Q66 "AP2300" SOT-23-3_L2.9-W1.3-P0.95-LS2.4-BR 4991,2995.97 r90 top
Q67 "AP2300" SOT-23-3_L2.9-W1.3-P0.95-LS2.4-BR 4996,2665.97 r90 top
Q68 "AP2300" SOT-23-3_L2.9-W1.3-P0.95-LS2.4-BR 5146,2665.97 r90 top
Q69 "AP2300" SOT-23-3_L2.9-W1.3-P0.95-LS2.4-BR 5296,2665.97 r90 top
Q70 "AP2300" SOT-23-3_L2.9-W1.3-P0.95-LS2.4-BR 5446,2665.97 r90 top
Q71 "AP2300" SOT-23-3_L2.9-W1.3-P0.95-LS2.4-BR 5596,2665.97 r90 top
Q72 "AP2300" SOT-23-3_L2.9-W1.3-P0.95-LS2.4-BR 5746,2665.97 r90 top
Q73 "AP2300" SOT-23-3_L2.9-W1.3-P0.95-LS2.4-BR 2866.89,2906.84 r0 top
Q74 "AP2300" SOT-23-3_L2.9-W1.3-P0.95-LS2.4-BR 2866.89,3056.84 r0 top
Q75 "AP2300" SOT-23-3_L2.9-W1.3-P0.95-LS2.4-BR 2866.89,3206.84 r0 top
Q76 "AP2300" SOT-23-3_L2.9-W1.3-P0.95-LS2.4-BR 2866.89,3356.84 r0 top
Q77 "AP2300" SOT-23-3_L2.9-W1.3-P0.95-LS2.4-BR 2866.89,3506.84 r0 top
Q78 "AP2300" SOT-23-3_L2.9-W1.3-P0.95-LS2.4-BR 2866.89,3656.84 r0 top
R1 "10" R0402 3161,3712.03 r90 top
R2 "10" R0402 3309,3712.03 r90 top
R3 "10" R0402 3605,3712.03 r90 top
R4 "10" R0402 3457,3712.03 r90 top
R5 "10" R0402 3901,3712.03 r90 top
R6 "10" R0402 3753,3712.03 r90 top
R7 "10" R0402 3751,3367.03 r90 top
R8 "10" R0402 3901,3367.03 r90 top
R9 "10" R0402 3456,3367.03 r90 top
R10 "10" R0402 3606,3367.03 r90 top
R11 "10" R0402 3311,3367.03 r90 top
R12 "10" R0402 3161,3367.03 r90 top
R13 "10" R0402 4656,3712.03 r90 top
R14 "10" R0402 4806,3712.03 r90 top
R15 "10" R0402 4361,3712.03 r90 top
R16 "10" R0402 4511,3712.03 r90 top
R17 "10" R0402 4216,3712.03 r90 top
R18 "10" R0402 4066,3712.03 r90 top
R19 "10" R0402 4966,3367.03 r90 top
R20 "10" R0402 5116,3367.03 r90 top
R21 "10" R0402 5411,3367.03 r90 top
R22 "10" R0402 5261,3367.03 r90 top
R23 "10" R0402 5701,3367.03 r90 top
R24 "10" R0402 5556,3367.03 r90 top
R25 "10" R0402 4961,3712.03 r90 top
R26 "10" R0402 5111,3712.03 r90 top
R27 "10" R0402 5406,3712.03 r90 top
R28 "10" R0402 5256,3712.03 r90 top
R29 "10" R0402 5701,3712.03 r90 top
R30 "10" R0402 5551,3712.03 r90 top
R31 "10" R0402 4656,3367.03 r90 top
R32 "10" R0402 4806,3367.03 r90 top
R33 "10" R0402 4361,3367.03 r90 top
R34 "10" R0402 4511,3367.03 r90 top
R35 "10" R0402 4216,3367.03 r90 top
R36 "10" R0402 4061,3362.03 r90 top
R37 "10" R0402 4946,3155.97 r270 top
R38 "10" R0402 4796,3155.97 r270 top
R39 "10" R0402 4506,3155.97 r270 top
R40 "10" R0402 4651,3155.97 r270 top
R41 "10" R0402 4206,3155.97 r270 top
R42 "10" R0402 4356,3155.97 r270 top
R43 "10" R0402 3470,2821.97 r270 top
R44 "10" R0402 3320,2821.97 r270 top
R45 "10" R0402 3765,2821.97 r270 top
R46 "10" R0402 3615,2821.97 r270 top
R47 "10" R0402 3915,2816.97 r270 top
R48 "10" R0402 4060,2821.97 r270 top
R49 "10" R0402 3461,3155 r270 top
R50 "10" R0402 3316,3160 r270 top
R51 "10" R0402 3760,3156.97 r270 top
R52 "10" R0402 3611,3155 r270 top
R53 "10" R0402 3906,3155 r270 top
R54 "10" R0402 4056,3155 r270 top
R55 "10" R0402 4951,2822.87 r270 top
R56 "10" R0402 4801,2822.87 r270 top
R57 "10" R0402 4506,2822.87 r270 top
R58 "10" R0402 4656,2822.87 r270 top
R59 "10" R0402 4211,2822.87 r270 top
R60 "10" R0402 4361,2822.87 r270 top
R61 "10" R0402 5841,3155.97 r270 top
R62 "10" R0402 5691,3155.97 r270 top
R63 "10" R0402 5396,3155.97 r270 top
R64 "10" R0402 5546,3155.97 r270 top
R65 "10" R0402 5101,3155.97 r270 top
R66 "10" R0402 5251,3155.97 r270 top
R67 "10" R0402 5251,2820.97 r270 top
R68 "10" R0402 5106,2825.97 r270 top
R69 "10" R0402 5551,2825.97 r270 top
R70 "10" R0402 5401,2825.97 r270 top
R71 "10" R0402 5696,2825.97 r270 top
R72 "10" R0402 5846,2825.97 r270 top
R73 "10" R0402 3028.86,2806.85 r180 top
R74 "10" R0402 3028.86,2954.85 r180 top
R75 "10" R0402 3028.86,3250.85 r180 top
R76 "10" R0402 3028.86,3102.85 r180 top
R77 "10" R0402 3026.89,3546.84 r180 top
R78 "10" R0402 3026.89,3396.84 r180 top
U1 "EG2133" TSSOP-20_L6.5-W4.4-P0.65-LS6.4-BL 2851.9,4074.03 r180 bottom
U2 "EG2133" TSSOP-20_L6.5-W4.4-P0.65-LS6.4-BL 3324.01,4085.03 r180 bottom
U3 "EG2133" TSSOP-20_L6.5-W4.4-P0.65-LS6.4-BL 3790.01,4090.03 r180 bottom
U4 "EG2133" TSSOP-20_L6.5-W4.4-P0.65-LS6.4-BL 5191.01,4103.03 r180 bottom
U5 "EG2133" TSSOP-20_L6.5-W4.4-P0.65-LS6.4-BL 4734.01,4097.03 r180 bottom
U6 "EG2133" TSSOP-20_L6.5-W4.4-P0.65-LS6.4-BL 4263.86,4093.03 r180 bottom
U7 "EG2133" TSSOP-20_L6.5-W4.4-P0.65-LS6.4-BL 4350.99,2455.97 r0 bottom
U8 "EG2133" TSSOP-20_L6.5-W4.4-P0.65-LS6.4-BL 3888.99,2454.97 r0 bottom
U9 "EG2133" TSSOP-20_L6.5-W4.4-P0.65-LS6.4-BL 3428.99,2462 r0 bottom
U10 "EG2133" TSSOP-20_L6.5-W4.4-P0.65-LS6.4-BL 4812.99,2458.97 r0 bottom
U11 "EG2133" TSSOP-20_L6.5-W4.4-P0.65-LS6.4-BL 5271.99,2464.97 r0 bottom
U12 "EG2133" TSSOP-20_L6.5-W4.4-P0.65-LS6.4-BL 5731.99,2468.97 r0 bottom
U13 "WAFER-XH2.54-2PLB" CONN-SMD_2P-P2.50_XUNPU_WAFER-XH2.54-2PLB 2496,3787.03 r270 top locked
U14 "EG2133" TSSOP-20_L6.5-W4.4-P0.65-LS6.4-BL 2687.97,2745.93 r270 bottom

## Footprints (in the part's own frame and the unit in brackets; to place one, negate y for a bottom-side part, rotate by r counter-clockwise, add the part's x,y. Pads: shape width x height; smd on the part's side, far side on the other; paste and mask are expansions set on the pad)
C0603 [mm]
  rect 0.8x0.9 smd: 1(-0.7,0) 2(0.7,0)
  silkscreen extent -1.41,-0.71 1.39,0.72
CONN-SMD_2P-P2.50_XUNPU_WAFER-XH2.54-2PLB [mm]
  rect 1.2x5.5 smd: 1(-1.25,1.875) 2(1.25,1.875)
  rect 1.5x3 smd: 3(4.35,-1.875) 4(-4.35,-1.875)
  silkscreen extent -5,-4.02 5,3.76
CONN-SMD_3P-P2.50_XUNPU_WAFER-XH2.54-3PWB [mm]
  rect 1.5x3.5 smd: 1(-2.5,3.7) 2(0,3.7) 3(2.5,3.7) 4(5.48,-3.7) 5(-5.48,-3.7)
  silkscreen extent -6.27,-5.48 6.23,3.64
FPC-SMD_JST_40FHH-SM1-GAN-TF [mm]
  rect 0.3x1.76 smd: 1(-9.75,2.495) 2(-9.25,2.495) 3(-8.75,2.495) 4(-8.25,2.495) 5(-7.75,2.495) 6(-7.25,2.495) 7(-6.75,2.495) 8(-6.25,2.495) 9(-5.75,2.495) 10(-5.25,2.495) 11(-4.75,2.495) 12(-4.25,2.495) 13(-3.75,2.495) 14(-3.25,2.495) 15(-2.75,2.495) 16(-2.25,2.495) 17(-1.75,2.495) 18(-1.25,2.495) 19(-0.75,2.495) 20(-0.25,2.495) 21(0.25,2.495) 22(0.75,2.495) 23(1.25,2.495) 24(1.75,2.495) 25(2.25,2.495) 26(2.75,2.495) 27(3.25,2.495) 28(3.75,2.495) 29(4.25,2.495) 30(4.75,2.495) 31(5.25,2.495) 32(5.75,2.495) 33(6.25,2.495) 34(6.75,2.495) 35(7.25,2.495) 36(7.75,2.495) 37(8.25,2.495) 38(8.75,2.495) 39(9.25,2.495) 40(9.75,2.495)
  rect 0.65x1.9 smd: 41(11.2,-2.495) 42(-11.2,-2.495)
  silkscreen extent -11.8,-4.32 11.79,3.77
R0402 [mm]
  rect 0.566x0.54 smd: 1(-0.433,0) 2(0.433,0)
  silkscreen extent -0.94,-0.5 0.94,0.5
SOD-123_L2.8-W1.8-LS3.7-RD [mm]
  rect 0.95x1.15 smd: 1(-1.693,0) 2(1.693,0)
  silkscreen extent -1.58,-0.87 1.41,0.87
SOT-23-3_L2.9-W1.3-P0.95-LS2.4-BR [mm]
  rect 1.25x0.7 smd: 1(1,-0.95) 2(1,0.95) 3(-1,0)
  silkscreen extent -0.73,-1.53 0.73,1.53
TSSOP-20_L6.5-W4.4-P0.65-LS6.4-BL [mm]
  oval 0.364x1.742 smd: 1(-2.925,-2.871) 2(-2.275,-2.871) 3(-1.625,-2.871) 4(-0.975,-2.871) 5(-0.325,-2.871) 6(0.325,-2.871) 7(0.975,-2.871) 8(1.625,-2.871) 9(2.275,-2.871) 10(2.925,-2.871) 11(2.925,2.871) 12(2.275,2.871) 13(1.625,2.871) 14(0.975,2.871) 15(0.325,2.871) 16(-0.325,2.871) 17(-0.975,2.871) 18(-1.625,2.871) 19(-2.275,2.871) 20(-2.925,2.871)
  silkscreen extent -3.71,-3.02 3.33,1.77

## Part data
CN1 CN2 CN3 CN4 CN5 CN6 CN7 CN8 CN9 CN10 CN11 CN12 CN13 U13: BOM_JLCPCB Part Class="Extended Part", BOM_Manufacturer=XUNPU(讯普), BOM_Supplier=LCSC, Contributor=lcsc
  CN1 CN2 CN3 CN4 CN5 CN6 CN7 CN8 CN9 CN10 CN11 CN12 CN13: BOM_Manufacturer Part=WAFER-XH2.54-3PWB, BOM_Supplier Part=C3029477, link=https://atta.szlcsc.com/upload/public/pdf/source/20220527/7ACD2214A426F03D9ACD52F5A71E518C.pdf, spicePre=C, spiceSymbolName=WAFER-XH2.54-3PWB
  U13: BOM_Manufacturer Part=WAFER-XH2.54-2PLB, BOM_Supplier Part=C3029467, link=https://atta.szlcsc.com/upload/public/pdf/source/20220527/139842C6548CEDBA8D9F0F4A441614CD.pdf, spicePre=U, spiceSymbolName=WAFER-XH2.54-2PLB
D1 D2 D3 D16 D17 D18 D25 D26 D27 D28 D29 D30 D37 D38 D39 D52 D53 D54 D55 D56 D57 D70 D71 D72 D79 D80 D81 D82 D83 D84 D91 D92 D93 D106 D107 D108 D109 D110 D118: BOM_JLCPCB Part Class="Extended Part", BOM_Manufacturer="Bourne Semicon (Shenzhen)", BOM_Manufacturer Part=FR107, BOM_Supplier=LCSC, BOM_Supplier Part=C511885, Contributor=LCSC, spicePre=D, spiceSymbolName=FR107_C511885
D4 D5 D6 D7 D8 D9 D10 D11 D12 D13 D14 D15 D19 D20 D21 D22 D23 D24 D31 D32 D33 D34 D35 D36 D40 D41 D42 D43 D44 D45 D46 D47 D48 D49 D50 D51 D58 D59 D60 D61 D62 D63 D64 D65 D66 D67 D68 D69 D73 D74 D75 D76 D77 D78 D85 D86 D87 D88 D89 D90 D94 D95 D96 D97 D98 D99 D100 D101 D102 D103 D104 D105 D112 D113 D114 D115 D116 D117: BOM_JLCPCB Part Class="Extended Part", BOM_Manufacturer="Sangdest Microelectronicstronic (Nanjing)", BOM_Manufacturer Part=1N4148W, BOM_Supplier=LCSC, BOM_Supplier Part=C176288, Contributor=LCSC, spicePre=D, spiceSymbolName=1N4148W_C176288
FPC2: BOM_JLCPCB Part Class="Extended Part", BOM_Manufacturer=JST, BOM_Manufacturer Part=40FHH-SM1-GAN-TF(LF)(SN), BOM_Supplier=LCSC, BOM_Supplier Part=C593938, Contributor=LCSC, link=https://atta.szlcsc.com//upload/public/pdf/source/20220125/5516BF2D32C3CEE5060B2D9C1CC5588E.pdf, spicePre=F, spiceSymbolName=40FHH-SM1-GAN-TF(LF)(SN)
Q1 Q2 Q3 Q4 Q5 Q6 Q7 Q8 Q9 Q10 Q11 Q12 Q13 Q14 Q15 Q16 Q17 Q18 Q19 Q20 Q21 Q22 Q23 Q24 Q25 Q26 Q27 Q28 Q29 Q30 Q31 Q32 Q33 Q34 Q35 Q36 Q37 Q38 Q39 Q40 Q41 Q42 Q43 Q44 Q45 Q46 Q47 Q48 Q49 Q50 Q51 Q52 Q53 Q54 Q55 Q56 Q57 Q58 Q59 Q60 Q61 Q62 Q63 Q64 Q65 Q66 Q67 Q68 Q69 Q70 Q71 Q72 Q73 Q74 Q75 Q76 Q77 Q78: BOM_JLCPCB Part Class="Extended Part", BOM_Manufacturer="ShenZhen Quan Li Semiconductor", BOM_Manufacturer Part=AP2300, BOM_Supplier=LCSC, BOM_Supplier Part=C360338, Contributor=LCSC, spicePre=Q, spiceSymbolName=AP2300
U1 U2 U3 U4 U5 U6 U7 U8 U9 U10 U11 U12 U14: BOM_JLCPCB Part Class="Extended Part", BOM_Manufacturer="EG Micro", BOM_Manufacturer Part=EG2133, BOM_Supplier=LCSC, BOM_Supplier Part=C190343, Contributor=LCSC, spicePre=U, spiceSymbolName=EG2133
C1 C2 C3 C4 C5 C6 C7 C8 C9 C10 C11 C12 C13 C14 C15 C16 C17 C18 C19 C20 C21 C22 C23 C24 C25 C26 C27 C28 C29 C30 C31 C32 C33 C34 C35 C36 C37 C38 C39 C40 C41 C42 C43 C44 C45 C46 C47 C48 C49 C50 C51 C52: Contributor=LCEDA_Lib, nameAlias=Value(F), spicePre=C, spiceSymbolName=C_0603_US
R1 R2 R3 R4 R5 R6 R7 R8 R9 R10 R11 R12 R13 R14 R15 R16 R17 R18 R19 R20 R21 R22 R23 R24 R25 R26 R27 R28 R29 R30 R31 R32 R33 R34 R35 R36 R37 R38 R39 R40 R41 R42 R43 R44 R45 R46 R47 R48 R49 R50 R51 R52 R53 R54 R55 R56 R57 R58 R59 R60 R61 R62 R63 R64 R65 R66 R67 R68 R69 R70 R71 R72 R73 R74 R75 R76 R77 R78: Contributor=LCEDA_Lib, nameAlias=Value(Ω), spicePre=R, spiceSymbolName=R_0603_US

## Via types
v1: diameter 17.72, hole 9.84, Top Layer 1 to Bottom Layer 1, tented both sides, 410 vias
v2: diameter 30, hole 15, Top Layer 1 to Bottom Layer 1, tented both sides, 54 vias
v3: diameter 78.74, hole 78.74, Top Layer 1 to Bottom Layer 1, 4 vias

## Nets (pads, with @x,y where several pads share a name; then routed paths per layer and width w, separated by ;. In a path a pad name is that pad's centre, name@x,y a point inside that pad or via, vN(x,y) a via of type N, cw(c..) or ccw(c..) an arc to the next point about the centre after c; other vN are vias at no path point)
HO1_1: D5.1 R1.1 U1.19 | length 922.9
  Top Layer 1 w10: v1(3156.67,3821.67) 3137.1,3802.1 3125,3790 3125,3700.86 3130.86,3695 R1.1@3161,3694.99 3161,3648.83 3166.86,3642.97 3192.97,3642.97 3194.22,3644.22 3224.83,3644.22 D5.1@3226,3645.4
  signal1 w10: v1(2940,4250) 2940,4205 3020,4125 3020,3937.65 3040.29,3917.36 3040.29,3854.71 3080,3815 3113.96,3815 3120.62,3821.67 v1(3156.67,3821.67)
  Bottom Layer 1 w10: v1(2940,4250) 2941.47,4248.53 U1.19@2941.47,4187.06
HO1_2: D7.1 R4.1 U1.16 | length 1263.7
  Top Layer 1 w10: v1(3420,3795) 3420,3710 3435.01,3694.99 R4.1@3457,3694.99 3457,3663 3474.6,3645.4 D7.1@3523.79,3645.4
  signal2 w10: v1(2860,4235) 2860,3830 2895,3795 v1(3420,3795)
  Bottom Layer 1 w10: v1(2860,4235) 2863.87,4231.13 2863.87,4187.89 U1.16@2864.7,4187.06
HO1_3: D9.1 R6.1 U1.13 | length 1592.4
  Top Layer 1 w10: v1(3720,3745) 3721.48,3743.52 3721.48,3703.52 3730.01,3694.99 R6.1@3753,3694.99 3753,3657 3765,3645 3821.18,3645 D9.1@3821.58,3645.4
  signal2 w10: v1(2786.46,4233.54) 2786.46,3875.54 2887,3775 3705,3775 3718.52,3761.48 3718.52,3746.48 v1(3720,3745)
  Bottom Layer 1 w10: v1@2785,4235 v1(2786.46,4233.54) 2787.93,4232.07 U1.13@2787.93,4187.06
HO2_1: D15.1 R12.1 U2.19 | length 3171.1
  Top Layer 1 w10: R12.1@3161,3349.99 3161,3314 3174.6,3300.4 D15.1@3226,3300.4 3264.14,3300.4 3270,3306.25 v1(3270,3415)
  signal1 w10: v1(2500,3455) 2340,3615 2340,4160 2550,4370 3255,4370 3343.25,4281.75 v1(3409.97,4281.75) ; v1(2575,3530) 2619.92,3530 2659.92,3490 2790,3490 2805,3505 2900,3505 2915,3490 3195,3490 v1(3270,3415)
  Bottom Layer 1 w10: v1(2500,3455) v1(2575,3530) ; v1@3410,4280 3413.58,4276.42 U2.19@3413.58,4198.06
HO2_2: D12.1 R9.1 U2.16 | length 3143.8
  Top Layer 1 w10: v1(3492.74,3373.89) 3491.26,3372.41 3491.26,3355.85 3485.4,3349.99 R9.1@3456,3349.99 3456,3309 3464.6,3300.4 D12.1@3526,3300.4
  signal1 w10: v1(2540,3450) 2360,3630 2360,4150 2560,4350 3235,4350 v1(3310,4275) ; v1(2600,3510) 2640,3470 2805,3470 2820,3485 2895,3485 2910,3470 3155,3470 3251.11,3373.89 v1(3492.74,3373.89)
  Bottom Layer 1 w10: v1(2540,3450) v1(2600,3510) ; v1(3310,4275) 3336.81,4248.19 U2.16@3336.81,4198.06
HO2_3: D10.1 R7.1 U2.13 | length 3331.6
  Top Layer 1 w10: v1(3795,3355) 3792.91,3355 3787.9,3349.99 R7.1@3751,3349.99 3751,3314 3760,3305 3816.4,3305 D10.1@3821,3300.4
  signal1 w10: v1(3260,4140) 3260,4175 3110,4325 2570,4325 2385,4140 2385,3640 2600,3425 3140,3425 3240,3325 3789.14,3325 3795,3330.86 v1(3795,3355)
  Bottom Layer 1 w10: v1(3260,4140) U2.13@3260,4198.03
HO3_1: D24.1 R18.1 U3.19 | length 1104.7
  Top Layer 1 w10: v1(4120,3735) 4120,3700.85 4114.14,3694.99 R18.1@4066,3694.99 4066,3659 4079.6,3645.4 D24.1@4131,3645.4
  signal2 w10: v1(3865,4265) 3865,4170 3785,4090 3785,3835 3885,3735 v1(4120,3735)
  Bottom Layer 1 w10: v1(3865,4265) 3879.58,4250.42 U3.19@3879.58,4203.06
HO3_2: D21.1 R15.1 U3.16 | length 1400
  Top Layer 1 w10: R15.1@4361,3694.99 4361,3659 4374.6,3645.4 D21.1@4428.6,3645.4 ; v1(4414.9,3705.1) 4414.9,3659.1 D21.1@4428.6,3645.4 ; D21.1@4431,3645.4 D21.1@4428.6,3645.4
  signal2 w10: v1(3785,4260) 3755,4230 3755,3832.37 3882.27,3705.1 v1(4414.9,3705.1) v1@4415,3705
  Bottom Layer 1 w10: v1(3785,4260) 3795,4260 3802.65,4252.35 3802.65,4203.22 U3.16@3802.81,4203.06
HO3_3: D19.1 R13.1 U3.13 | length 1574.5
  Top Layer 1 w10: R13.1@4656,3694.99 4656,3659 4669.6,3645.4 D19.1@4726,3645.4 4724.7,3645.4 4711,3659.1 v1(4711,3674)
  signal2 w10: v1(3725.52,4145.52) 3725.52,3824.48 3876,3674 v1(4711,3674)
  Bottom Layer 1 w10: v1@3725,4145 v1(3725.52,4145.52) 3726.03,4146.03 U3.13@3726.03,4203.06
HO4_1: D51.1 R36.1 U6.19 | length 2314.6
  Top Layer 1 w10: R36.1@4061,3344.99 4061,3309 4070,3300 4130.61,3300 D51.1@4131,3300.4 4141.4,3290 v1(4170,3290)
  signal2 w10: v1(4170,3290) 4835,3290 4900,3355 4900,3590 4875,3615 4875,3720 4770,3825 4460,3825 4335.27,3949.73 v1(4335.27,4270.94)
  Bottom Layer 1 w10: v1@4335,4270 4345,4260 4347.57,4260 4353.43,4254.14 U6.19@4353.43,4206.06
HO4_2: D48.1 R33.1 U6.16 | length 1908.6
  Top Layer 1 w10: R33.1@4361,3349.99 4361,3310.86 4366.86,3305 4421.4,3305 D48.1@4426,3300.4
  signal2 w10: v1(4275.83,4140.83) 4275.83,3969.17 4450,3795 4765,3795 4845,3715 4845,3595 4870,3570 4870,3375 4810,3315 4365,3315 v1@4360,3310
  Bottom Layer 1 w10: v1@4275,4140 v1(4275.83,4140.83) 4276.66,4141.66 U6.16@4276.66,4206.06
  other v1: 4362.5,3312.5
HO4_3: D46.1 R31.1 U6.13 | length 1473.3
  Top Layer 1 w10: R31.1@4656,3349.99 4656,3306.25 4661.86,3300.4 D46.1@4726,3300.4 4726,3336.03 v1(4745.27,3355.3)
  signal2 w10: v1(4199.89,4135.11) 4199.89,4010.11 4440,3770 4755,3770 4785,3740 4785,3395 v1(4745.27,3355.3)
  Bottom Layer 1 w10: U6.13@4199.89,4206.06 v1(4199.89,4135.11) v1@4200,4135
HO5_1: D40.1 R25.1 U5.19 | length 925.1
  Top Layer 1 w10: R25.1@4961,3694.99 4961,3664 4979.6,3645.4 D40.1@5026,3645.4 5026,3691 5080,3745 5080,3767.46 5077,3770.46 v1(5077,3795)
  signal2 w10: v1(4820.12,4257.46) 4820.12,3999.88 5025,3795 v1(5077,3795)
  Bottom Layer 1 w10: v1(4820.12,4257.46) 4822.75,4254.84 4822.75,4210.89 U5.19@4823.58,4210.06
HO5_2: D43.1 R28.1 U5.16 | length 1096.2
  Top Layer 1 w10: v1(5227.86,3755) 5227.86,3728.31 5225,3725.46 5225,3700.86 5230.86,3695 R28.1@5256,3694.99 5256,3659 5265,3650 5321.4,3650 D43.1@5326,3645.4
  signal2 w10: v1(4745.98,4249.02) 4745.98,3964.02 4957,3753 5120.35,3753 5122.35,3755 v1(5227.86,3755)
  Bottom Layer 1 w10: v1@4745,4250 v1(4745.98,4249.02) 4745.98,4210.89 U5.16@4746.81,4210.06
HO5_3: D45.1 R30.1 U5.13 | length 1656.8
  Top Layer 1 w10: R30.1@5551,3694.99 5551,3659 5564.6,3645.4 5610,3645.4 5603.36,3652.03 5603.36,3724.55 5600,3727.91 v1(5600,3730)
  signal2 w10: v1(4645,4265) 4645,3895 4670,3870 4805,3870 4945,3730 v1(5600,3730)
  Bottom Layer 1 w10: v1(4645,4265) 4660,4265 4670.03,4254.97 U5.13@4670.03,4210.06
HO6_1: D31.1 R19.1 U4.19 | length 1719.7
  Top Layer 1 w10: R19.1@4966,3349.99 4966,3310.86 4971.86,3305 5026.4,3305 D31.1@5031,3300.4 5035,3304.39 v1(5035,3335)
  signal2 w10: v1(5035,3335) 5365,3335 5645,3615 5645,3855 5286.11,4213.89 v1(5286.11,4264.57)
  Bottom Layer 1 w10: U4.19@5280.58,4216.06 5281.41,4216.89 5281.41,4259.86 v1(5286.11,4264.57)
HO6_2: D34.1 R22.1 U4.16 | length 1467.7
  Top Layer 1 w10: v1(5305,3395) 5305,3355.85 5299.14,3349.99 R22.1@5261,3349.99 5261,3310.86 5266.86,3305 5326.4,3305 D34.1@5331,3300.4
  signal2 w10: v1(5205,4260) 5625,3840 5625,3625 5395,3395 v1(5305,3395)
  Bottom Layer 1 w10: U4.16@5203.81,4216.06 5204.63,4216.89 5204.63,4259.63 v1(5205,4260)
HO6_3: D36.1 R24.1 U4.13 | length 1529.4
  Top Layer 1 w10: R24.1@5556,3349.99 5556,3306.25 5561.86,3300.4 D36.1@5626,3300.4 5626,3342.82 v1(5604.62,3364.21)
  signal1 w10: v1(5126.21,4176.21) 5140,4162.41 5140,3680 5095,3635 5095,3445 5175,3365 5603.82,3365 v1(5604.62,3364.21)
  Bottom Layer 1 w10: v1@5125,4175 v1(5126.21,4176.21) 5126.21,4215.23 U4.13@5127.03,4216.06
HO7_1: D105.1 R72.1 U12.19 | length 957.1
  Top Layer 1 w10: v1(5740,2910) 5742.09,2910 5745.78,2906.3 5767.3,2906.3 D105.1@5781,2892.6 5793.6,2880 5840,2880 5846,2874 R72.1@5846,2843.01
  signal2 w10: v1(5637.89,2294.6) 5585,2347.48 5585,2826.64 5668.36,2910 v1(5740,2910)
  Bottom Layer 1 w10: v1@5639.28,2295.49 5642.42,2298.63 U12.19@5642.42,2355.94
HO7_2: D102.1 R69.1 U12.16 | length 865.8
  Top Layer 1 w10: D102.1@5481,2892.6 5537.6,2892.6 5551,2879.21 R69.1@5551,2843.01 5591.99,2843.01 5603.58,2831.42 5603.58,2811.12 v1(5605.06,2809.64)
  signal2 w10: v1(5605.06,2809.64) 5605,2809.59 5605,2505 5629.61,2480.39 v1(5800.99,2480.39)
  Bottom Layer 1 w10: U12.16@5719.19,2355.94 5719.19,2409.19 5790,2480 v1@5800,2480
HO7_3: D100.1 R67.1 U12.13 | length 1378.2
  Top Layer 1 w10: D100.1@5186,2892.6 5237.4,2892.6 5251,2879 ; R67.1@5251,2838.01 5251,2879 ; v1(5253.9,2905.81) 5253.9,2881.91 5251,2879
  signal1 w10: v1@5255.29,2906.7 5277.7,2929.11 v1(5408.61,2929.11)
  signal2 w10: v1@5410,2930 5410,2775 5475,2710 5475,2635 5455,2615 5455,2405 5585,2275 5659.5,2275 v1(5798.61,2414.11)
  Bottom Layer 1 w10: U12.13@5795.97,2355.94 5795.97,2410.97 v1@5800,2415
HO8_1: D94.1 R61.1 U11.19 | length 1537.1
  Top Layer 1 w10: v1(5742.62,3245.14) 5743.97,3243.79 5750.88,3243.79 5785.38,3209.28 5805.23,3209.28 5841,3173.51 R61.1@5841,3173.01
  signal2 w10: v1(5118.61,2374.11) 5118.61,2588.61 5170,2640 5170,2915 5509.78,3254.78 5626.83,3254.78 5636.35,3245.26 5742.5,3245.26 v1(5742.62,3245.14)
  Bottom Layer 1 w10: v1@5120,2375 5120,2385 5139.38,2404.38 5175.74,2404.38 5181.59,2398.52 5181.59,2352.77 U11.19@5182.42,2351.94
HO8_2: D97.1 R64.1 U11.16 | length 1348.2
  Top Layer 1 w10: v1(5471.85,3168.97) 5473.33,3170.45 5543.44,3170.45 R64.1@5546,3173.01 5546,3209 5532.4,3222.6 D97.1@5476,3222.6
  signal2 w10: v1(5315,2450) 5166.92,2450 5140,2476.92 5140,2585 5190,2635 5190,2905 5454.87,3169.87 v1@5473.24,3169.87
  Bottom Layer 1 w10: U11.16@5259.19,2351.94 5259.19,2414.19 5281.05,2436.05 5298.97,2436.05 5312.91,2450 v1(5315,2450)
HO8_3: D99.1 R66.1 U11.13 | length 1524.1
  Top Layer 1 w10: D99.1@5176,3225.63 5229.37,3225.63 ; R66.1@5251,3173.01 5251,3204 5229.37,3225.63 ; v1(5433.61,3119.11) 5432.99,3119.72 5432.99,3202.01 5384.14,3250.86 5358.22,3250.86 5357.78,3251.3 5248.31,3251.3 5229.37,3232.37 5229.37,3225.63
  signal2 w10: v1(5335.27,2405.14) 5335.27,2430.27 5365,2460 5365,2489.14 5359.14,2495 5175,2495 5160,2510 5160,2580 5210,2630 5210,2895 v1@5435,3120
  Bottom Layer 1 w10: v1@5335,2405 5335.97,2404.03 U11.13@5335.97,2351.94
HO9_1: D85.1 R55.1 U10.19 | length 1077.4
  Top Layer 1 w10: v1(4846.18,2861.16) 4846.73,2860.6 4860.6,2860.6 4868.36,2868.36 4868.36,2875.8 4882.06,2889.5 4939.5,2889.5 4951,2878.01 R55.1@4951,2839.91
  signal2 w10: v1(4730,2400) 4582.86,2400 4577,2405.86 4577,2797.74 4655.75,2876.49 4664.03,2876.49 4680.53,2860 4845.02,2860 v1(4846.18,2861.16)
  Bottom Layer 1 w10: U10.19@4723.42,2345.94 4723.42,2393.42 v1(4730,2400)
HO9_2: D88.1 R58.1 U10.16 | length 1340.6
  Top Layer 1 w10: D88.1@4586,2889.5 4634.5,2889.5 4635.86,2890.86 4656,2870.72 R58.1@4656,2839.91
  signal2 w10: v1(4625,2890) 4625,2899.14 4630.86,2905 4860,2905 4875,2890 4875,2845.86 4859.14,2830 4655,2830 4625.72,2800.72 4625.72,2439.28 4635,2430 4819.09,2430 v1(4819.23,2430.14)
  Bottom Layer 1 w10: U10.16@4800.19,2345.94 4800.19,2411.11 v1(4819.23,2430.14)
HO9_3: D90.1 R60.1 U10.13 | length 2042.8
  Top Layer 1 w10: v1(4096.14,2900.13) 4116.01,2920 4197.26,2920 4214.06,2903.2 4277.3,2903.2 D90.1@4291,2889.5 4345.5,2889.5 4361,2874 R60.1@4361,2839.91
  signal2 w10: v1(4096.14,2900.13) 4096.14,2727.09 4090,2720.95 4090,2550 4205,2435 4205,2255 4285,2175 4905,2175 4965,2235 v1(4965,2305)
  Bottom Layer 1 w10: U10.13@4876.97,2345.94 4876.14,2345.11 4876.14,2313.86 4895,2295 4955,2295 v1(4965,2305)
HO10_1: D58.1 R37.1 U7.19 | length 1462.1
  Top Layer 1 w10: v1(4845,3220) 4878.39,3220 D58.1@4881,3222.6 4932.4,3222.6 4946,3209 R37.1@4946,3173.01
  signal1 w10: v1(4265,2295) 4265,2565 4435,2735 4575,2735 4775,2935 4775,3180 4820,3225 4840,3225 v1(4845,3220)
  Bottom Layer 1 w10: U7.19@4261.42,2342.94 4261.42,2298.58 v1(4265,2295)
HO10_2: D61.1 R40.1 U7.16 | length 1711
  Top Layer 1 w10: D61.1@4581,3222.6 D61.1@4584.93,3222.6 ; v1(4612.19,3249.86) D61.1@4584.93,3222.6 ; R40.1@4651,3173.01 4645.37,3178.64 4645.37,3189.63 4645,3190 4645,3215 4637.4,3222.6 D61.1@4584.93,3222.6
  signal1 w10: v1(4335,2410) 4285,2460 4285,2555 4445,2715 4590,2715 4795,2920 4795,3165 4820,3190 4869.14,3190 4875,3195.86 4875,3254.14 4869.14,3260 4651.34,3260 4641.2,3249.86 v1(4612.19,3249.86)
  Bottom Layer 1 w10: v1(4335,2410) 4338.19,2406.81 U7.16@4338.19,2342.94
HO10_3: D63.1 R42.1 U7.13 | length 2065.5
  Top Layer 1 w10: D63.1@4286,3222.6 4337.4,3222.6 4356,3204 R42.1@4356,3173.01
  signal1 w10: v1(4335,3220) 4335,3245 4334.14,3245.86 4334.14,3254.14 4365,3285 4880,3285 4905,3260 4905,3180 4890,3165 4835,3165 4815,3145 4815,2905 4605,2695 4460,2695 4305,2540 4305,2505 v1(4415,2395)
  Bottom Layer 1 w10: U7.13@4415,2342.97 v1(4415,2395)
HO11_1: D69.1 R48.1 U8.19 | length 852.6
  Top Layer 1 w10: v1(3950,2890) 3993.6,2890 D69.1@3995,2888.6 4032.64,2888.6 4040.22,2881.01 4040.22,2859.29 4060,2839.51 R48.1@4060,2839.01
  signal1 w10: v1(3800,2295) 3800,2297.09 3795,2302.09 3795,2725 3950,2880 v1(3950,2890)
  Bottom Layer 1 w10: U8.19@3799.42,2341.94 3799.42,2295.58 v1(3800,2295)
HO11_2: D66.1 R45.1 U8.16 | length 743
  Top Layer 1 w10: D66.1@3700,2888.6 3751.4,2888.6 3765,2875 R45.1@3765,2839.01 3765.08,2839.1 3792.38,2839.1 3798.24,2833.24 3798.24,2727.71 3813.86,2712.09 v1(3813.86,2710)
  signal1 w10: v1(3813.86,2710) 3815,2708.86 3815,2370 v1(3880,2305)
  Bottom Layer 1 w10: U8.16@3876.19,2341.94 3877.02,2341.11 3877.02,2310.06 3880,2307.09 v1(3880,2305)
HO11_3: D64.1 R43.1 U8.13 | length 1068.7
  Top Layer 1 w10: v1(3395,2835) 3395,2837.09 3400,2842.09 D64.1@3400,2888.6 3451.4,2888.6 3470,2870 R43.1@3470,2839.01
  signal2 w10: v1(3395,2835) 3395,2705 3465,2635 3565,2635 3625,2575 3625,2510 3733.81,2401.19 v1(3950.29,2401.19)
  Bottom Layer 1 w10: U8.13@3952.97,2341.94 v1@3952.97,2397.03
HO12_1: D78.1 R54.1 U9.19 | length 2303
  Top Layer 1 w10: v1(3990,3250) 3990,3227.63 D78.1@3991,3226.63 4043.37,3226.63 4056,3214 R54.1@4056,3172.04
  signal2 w10: v1(3340,2300) 3150,2300 3050,2400 3050,3215 3100,3265 3982.7,3265 3990,3257.7 v1(3990,3250)
  Bottom Layer 1 w10: U9.19@3339.43,2348.97 3339.43,2300.57 v1(3340,2300)
HO12_2: D75.1 R51.1 U9.16 | length 2133.9
  Top Layer 1 w10: D75.1@3691,3221.63 3748.37,3221.63 v1(3760,3210) R51.1@3760,3174.01
  signal2 w10: v1(3435,2295) 3410,2320 3160,2320 3075,2405 3075,3065 3105,3095 3105,3125 3070,3160 3070,3200 3115,3245 3745,3245 3760,3230 v1(3760,3210)
  Bottom Layer 1 w10: U9.16@3416.2,2348.97 3417.03,2348.14 3417.03,2312.97 v1(3435,2295)
HO12_3: D73.1 R49.1 U9.13 | length 1781.4
  Top Layer 1 w10: D73.1@3396,3226.63 3448.37,3226.63 3461,3214 R49.1@3461,3172.04
  signal2 w10: v1(3460,3210) 3445,3225 3150,3225 3130,3205 3130,3080 3120,3070 3120,2950 3105,2935 3105,2405 3170,2340 3464.78,2340 v1(3509.89,2294.89)
  Bottom Layer 1 w10: U9.13@3492.97,2348.97 3493.8,2348.14 3493.8,2306.2 3495.32,2304.68 3498.02,2304.68 3507.8,2294.89 v1(3509.89,2294.89)
HO13_1: D112.1 R73.1 U14.19 | length 917.9
  Top Layer 1 w10: R73.1@3045.9,2806.85 3081.85,2806.85 3095,2820 3095,2868.32 3096.68,2870 3128.92,2870 3134.78,2875.86 3134.78,2893.51 v1(3136.26,2894.98)
  signal1 w10: v1(2641.26,2834.98) 2641.26,2901.26 2735,2995 3115,2995 3135,2975 v1@3135,2895
  Bottom Layer 1 w10: U14.19@2574.94,2835.5 2639.5,2835.5 v1@2640,2835
HO13_2: D115.1 R76.1 U14.16 | length 1153.2
  Top Layer 1 w10: R76.1@3045.9,3102.85 3077.15,3102.85 3084.82,3110.51 3084.82,3158.14 D115.1@3098.52,3171.84
  signal1 w10: v1(2619.99,2758.71) 2511.29,2758.71 2490,2780 2490,3005 2595,3110 3076.65,3110 v1@3080.48,3106.17
  Bottom Layer 1 w10: U14.16@2574.94,2758.73 2618.73,2758.73 v1@2619.39,2759.39
  other v1: 3081.74,3106.15
HO13_3: D117.1 R78.1 U14.13 | length 1575.8
  Top Layer 1 w10: R78.1@3043.93,3396.84 3079.14,3396.84 3085,3402.7 3085,3458.32 D117.1@3093.52,3466.84
  signal1 w10: v1(2636.26,2684.98) 2500.02,2684.98 2470,2715 2470,3247.79 2597.21,3375 3075,3375 3085,3385 v1@3085,3405
  Bottom Layer 1 w10: U14.13@2574.94,2681.96 2631.96,2681.96 v1@2635,2685
  other v1: 3086.26,3404.98
LO1_1: D4.1 R2.1 U1.11 | length 1831.5
  Top Layer 1 w10: v1(3355,3735) 3355,3700.85 3349.14,3694.99 R2.1@3309,3694.99 3309,3656 3319.6,3645.4 D4.1@3374.9,3645.4
  signal2 w10: v1(2720,4215) 2625,4215 2530,4120 2530,3646.74 2536.74,3640 3305,3640 3355,3690 v1(3355,3735)
  Bottom Layer 1 w10: v1(2720,4215) 2734.75,4215 2736.75,4213 U1.11@2736.75,4187.06
LO1_2: D6.1 R3.1 U1.10 | length 2197.1
  Top Layer 1 w10: v1(3660,3745) 3660,3719.11 3644.97,3704.08 3644.97,3702.06 3637.9,3694.99 R3.1@3605,3694.99 3605,3650 3609.6,3645.4 D6.1@3672.68,3645.4
  signal2 w10: v1(2500,4035) 2500,3625.86 2510.86,3615 3625,3615 3660,3650 v1(3660,3745)
  Bottom Layer 1 w10: v1(2500,4035) 2730.89,4035 2736.75,4029.14 U1.10@2736.75,3961
LO1_3: D8.1 R5.1 U1.9 | length 2655.2
  Top Layer 1 w10: R5.1@3901,3694.99 3901,3664 3920,3645 D8.1@3970.08,3645 ; v1(3969,3615) 3969,3643.92 D8.1@3970.08,3645 ; D8.1@3970.47,3645.4 D8.1@3970.08,3645
  signal2 w10: v1(2440,4065) 2475,4030 2475,3610 2490,3595 3948.19,3595 3968.19,3615 v1(3969,3615) ; v1(2555,4065) 2556.92,4063.08 2556.92,3985.89 2582.81,3960 2735,3960 2765,3930 v1(2765,3890)
  Bottom Layer 1 w10: v1(2440,4065) v1(2555,4065) ; U1.9@2762.34,3961 2762.34,3892.66 v1(2765,3890)
LO2_1: D14.1 R11.1 U2.11 | length 2643.6
  Top Layer 1 w10: v1(3360,3350) R11.1@3311,3349.99 3311,3306 3316.86,3300.15 3337.49,3300.15 3337.74,3300.4 D14.1@3376,3300.4
  signal1 w10: v1(3190,4195) 3080,4305 2580,4305 2405,4130 2405,3650 2610,3445 3148.06,3445 3243.06,3350 v1(3360,3350)
  Bottom Layer 1 w10: v1(3190,4195) 3206.85,4195 3208.85,4197 U2.11@3208.85,4198.06
LO2_2: D13.1 R10.1 U2.10 | length 1390.6
  Top Layer 1 w10: R10.1@3606,3349.99 3606,3319 3625,3300 3670.61,3300 D13.1@3671,3300.4 3671,3331 3715,3375 3715,3515 3753.52,3553.52 3753.52,3563.52 v1(3755,3565)
  Bottom Layer 1 w10: U2.10@3208.85,3972 3208.85,3947 3206.85,3945 3180,3945 3140,3905 3140,3865 3185,3820 3185,3705 3256,3634 3736,3634 3755,3615 v1(3755,3565)
LO2_3: D11.1 R8.1 U2.9 | length 1318.2
  Top Layer 1 w10: v1(3865,3518.86) 3865,3360.86 3875.37,3350.48 3900.51,3350.48 R8.1@3901,3349.99 3901,3309 3910,3300 3970.61,3300 D11.1@3971,3300.4
  Bottom Layer 1 w10: U2.9@3234.44,3972 3234.44,3945.56 3250,3930 3250,3841.41 3245.78,3837.19 3245.78,3694.22 3288,3652 3778,3652 3865,3565 v1(3865,3518.86)
LO3_1: D23.1 R17.1 U3.11 | length 1230.4
  Top Layer 1 w10: R17.1@4216,3694.99 4216,3654 4225.86,3644.14 4242.11,3644.14 4243.36,3645.4 D23.1@4281,3645.4
  signal2 w10: v1(3675,4255) 3675,3845 3875,3645 v1(4250,3645)
  Bottom Layer 1 w10: U3.11@3674.85,4203.06 3674.85,4254.85 v1(3675,4255)
LO3_2: D22.1 R16.1 U3.10 | length 1254.8
  Top Layer 1 w10: v1(4475,3700) 4477.09,3700 4482.1,3694.99 R16.1@4511,3694.99 4511,3659 4524.6,3645.4 D22.1@4576,3645.4
  Bottom Layer 1 w10: U3.10@3674.85,3977 3642,3977 3635,3970 3635,3835 3702,3768 4469.14,3768 4475,3762.14 v1(4475,3700)
LO3_3: D20.1 R14.1 U3.9 | length 1436.3
  Top Layer 1 w10: R14.1@4806,3694.99 4806,3659 v1(4815,3650) 4871.4,3650 D20.1@4876,3645.4
  Bottom Layer 1 w10: U3.9@3700.44,3977 3700.44,3849.56 3761,3789 4632,3789 4761,3660 4805,3660 v1(4815,3650)
LO4_1: D50.1 R35.1 U6.11 | length 1995.4
  Top Layer 1 w10: R35.1@4216,3349.99 4216,3311 4226.61,3300.4 D50.1@4281,3300.4 4280,3301.4 v1(4280,3340)
  signal2 w10: v1(4146.85,4258.15) 4146.85,4033.15 4435,3745 4745,3745 4755,3735 4755,3400 4695,3340 v1(4280,3340)
  Bottom Layer 1 w10: v1@4145,4260 v1(4146.85,4258.15) 4148.71,4256.29 U6.11@4148.71,4206.06
LO4_2: D49.1 R34.1 U6.10 | length 1263.6
  Top Layer 1 w10: R34.1@4511,3349.99 4511,3306.25 4516.86,3300.4 4565,3300.4 4558.36,3307.03 4558.36,3374.55 4555,3377.91 v1(4555,3380)
  signal1 w10: v1(4085.14,3835) 4085.14,3439.86 4145,3380 v1(4555,3380)
  Bottom Layer 1 w10: v1(4085.14,3835) 4085.14,3946.86 4119.14,3980.86 4120,3980 U6.10@4148.71,3980